# Altium PCB LUCRARE_LICENTA_PCB.PcbDoc
Units mm, origin at the board's own origin, x right, y up, seen from the top; angles counter-clockwise.
Board outline 100 x 100 mm, 4 copper layers (Top Layer, Int2 (Sign), Int3 (Sign), Bottom Layer), stack 1.481 mm thick; 103 components, 59 nets, 263 pads, 33 vias.
Unrouted connection lines stored in the file: 59.
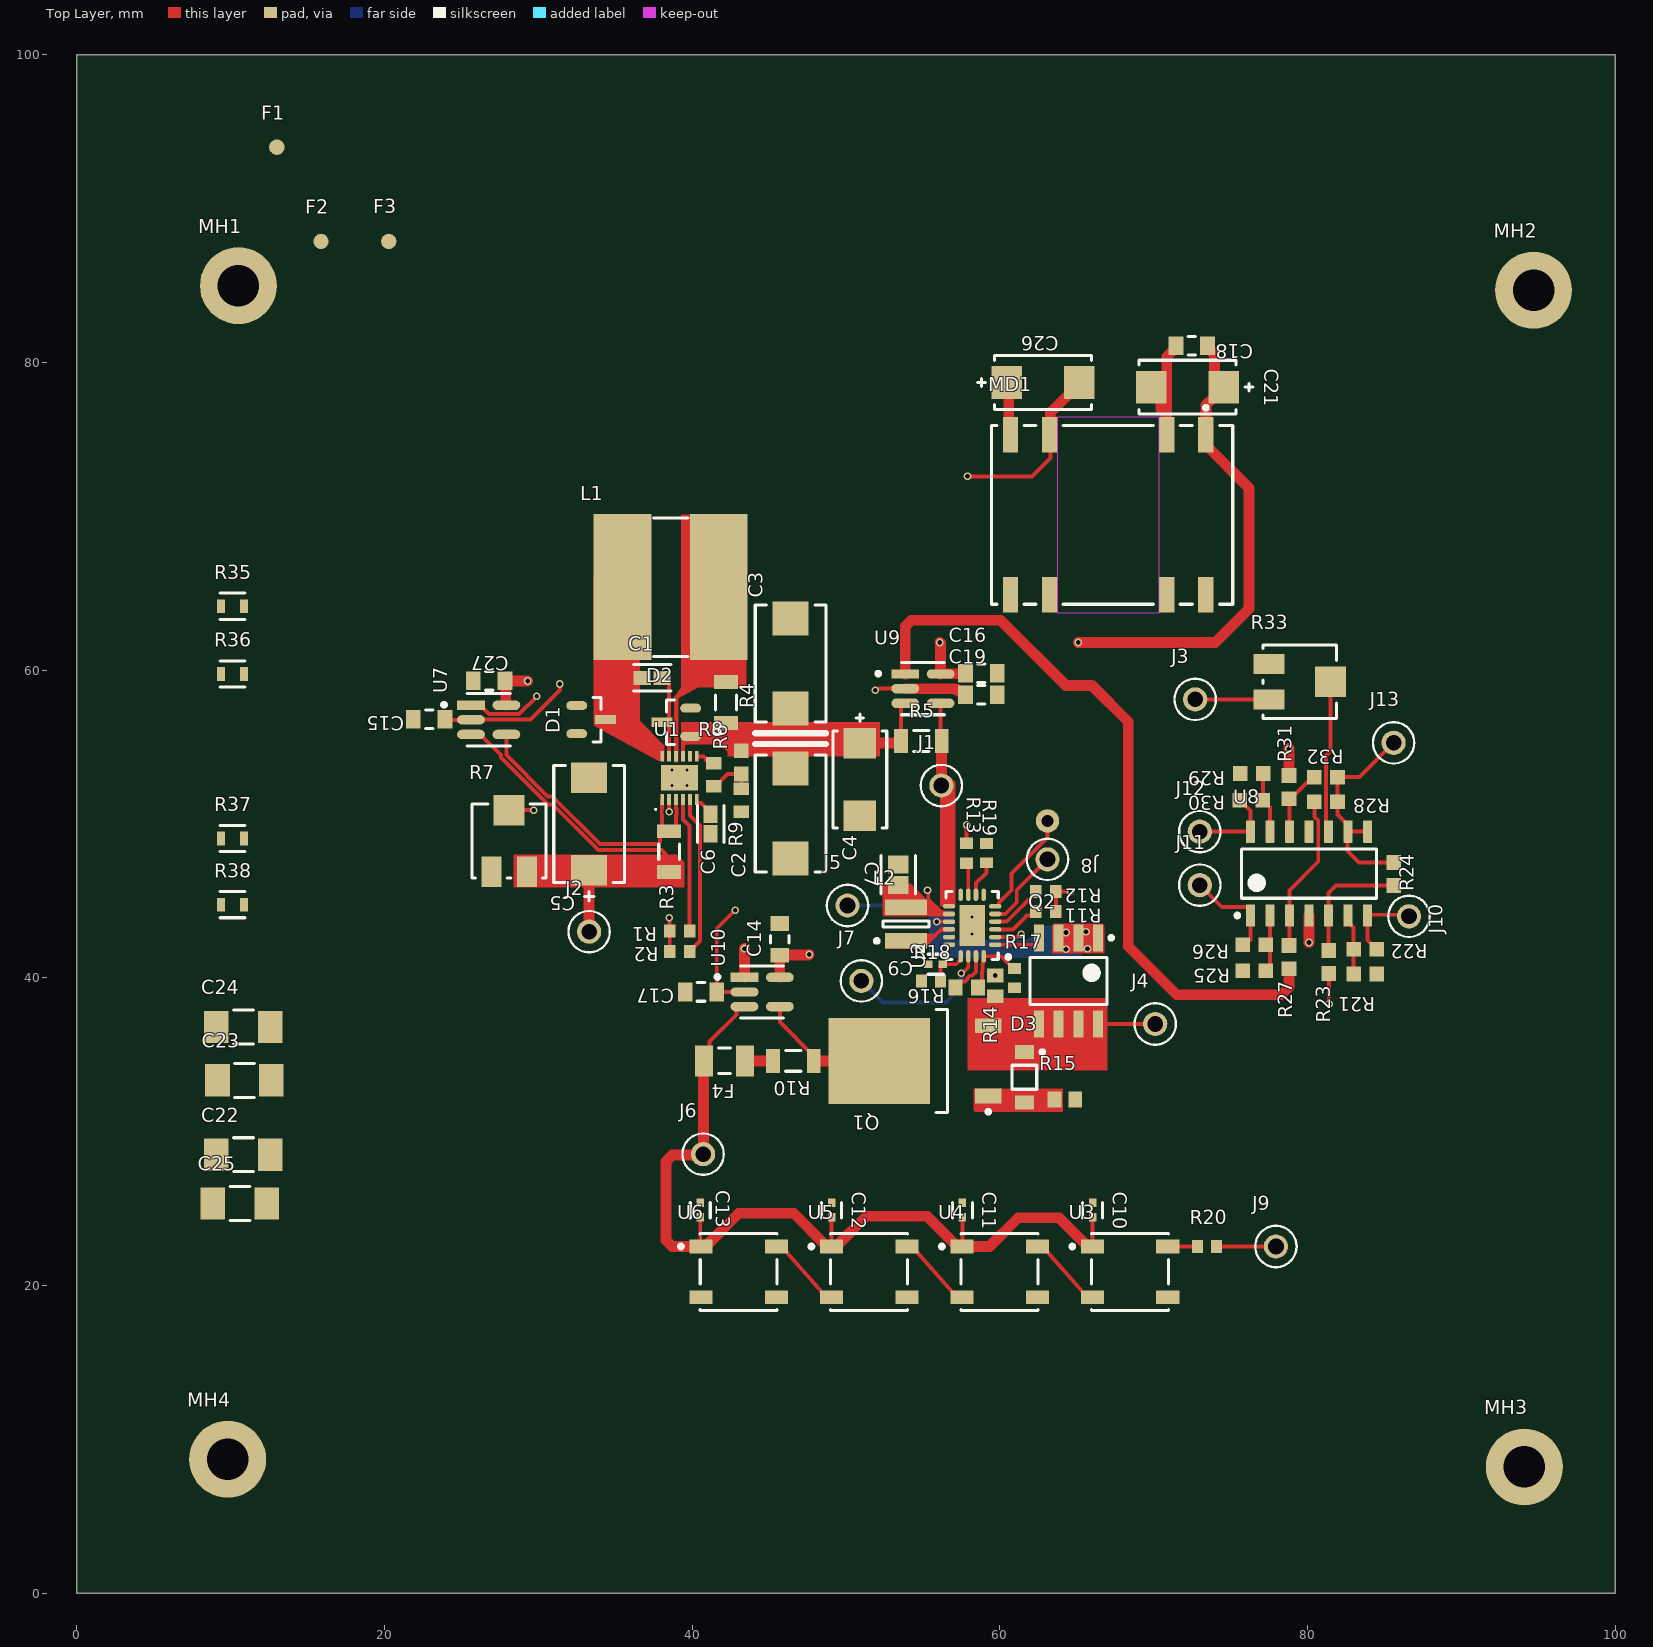
[diagram p0: Top Layer view]
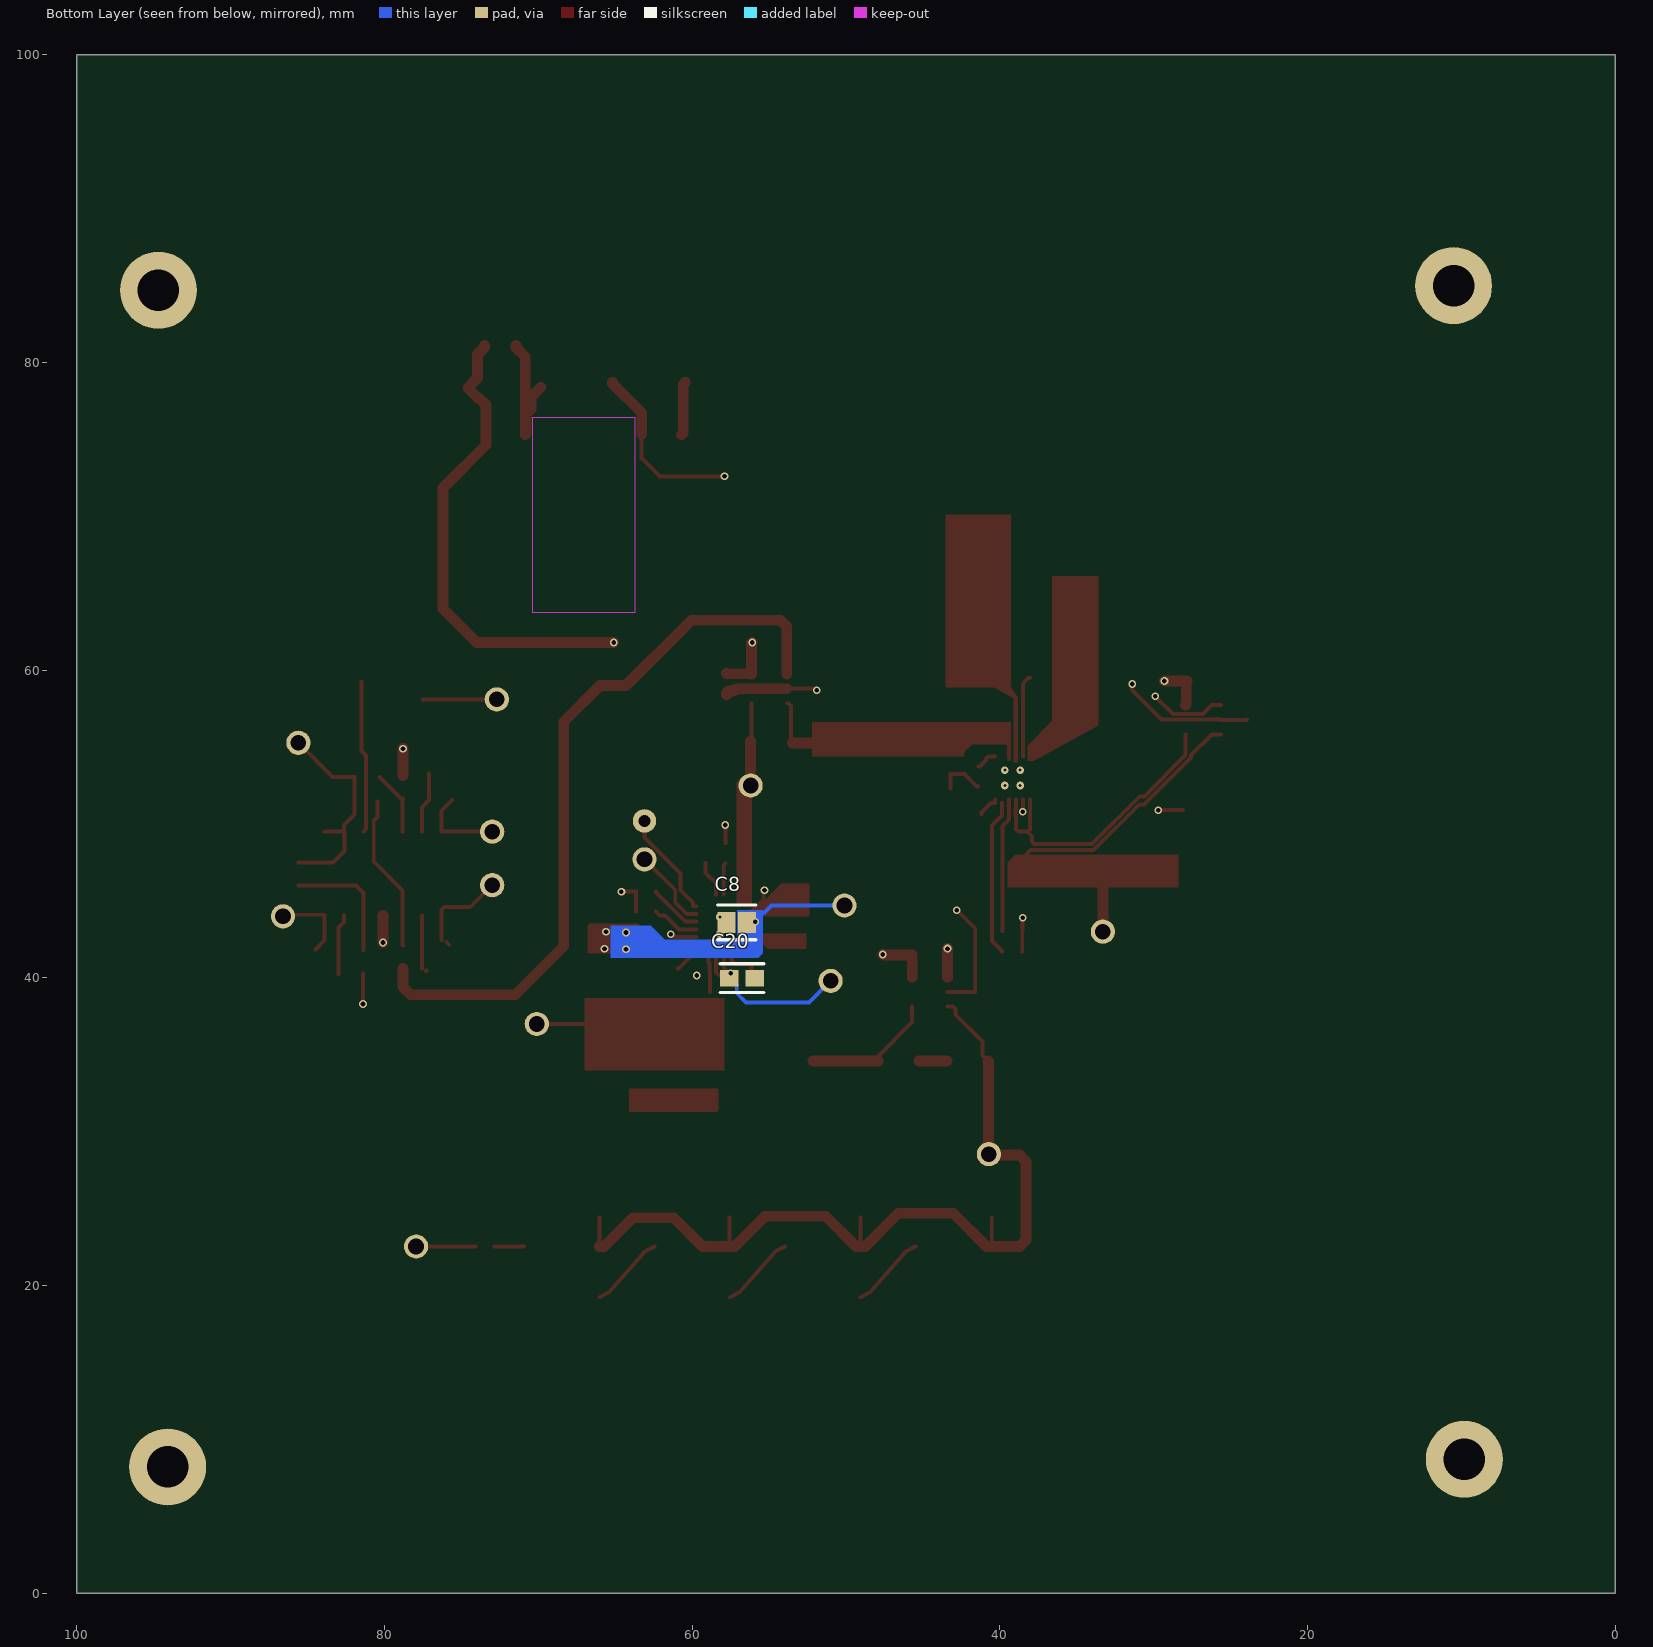
[diagram p1: Bottom Layer view, seen from below]
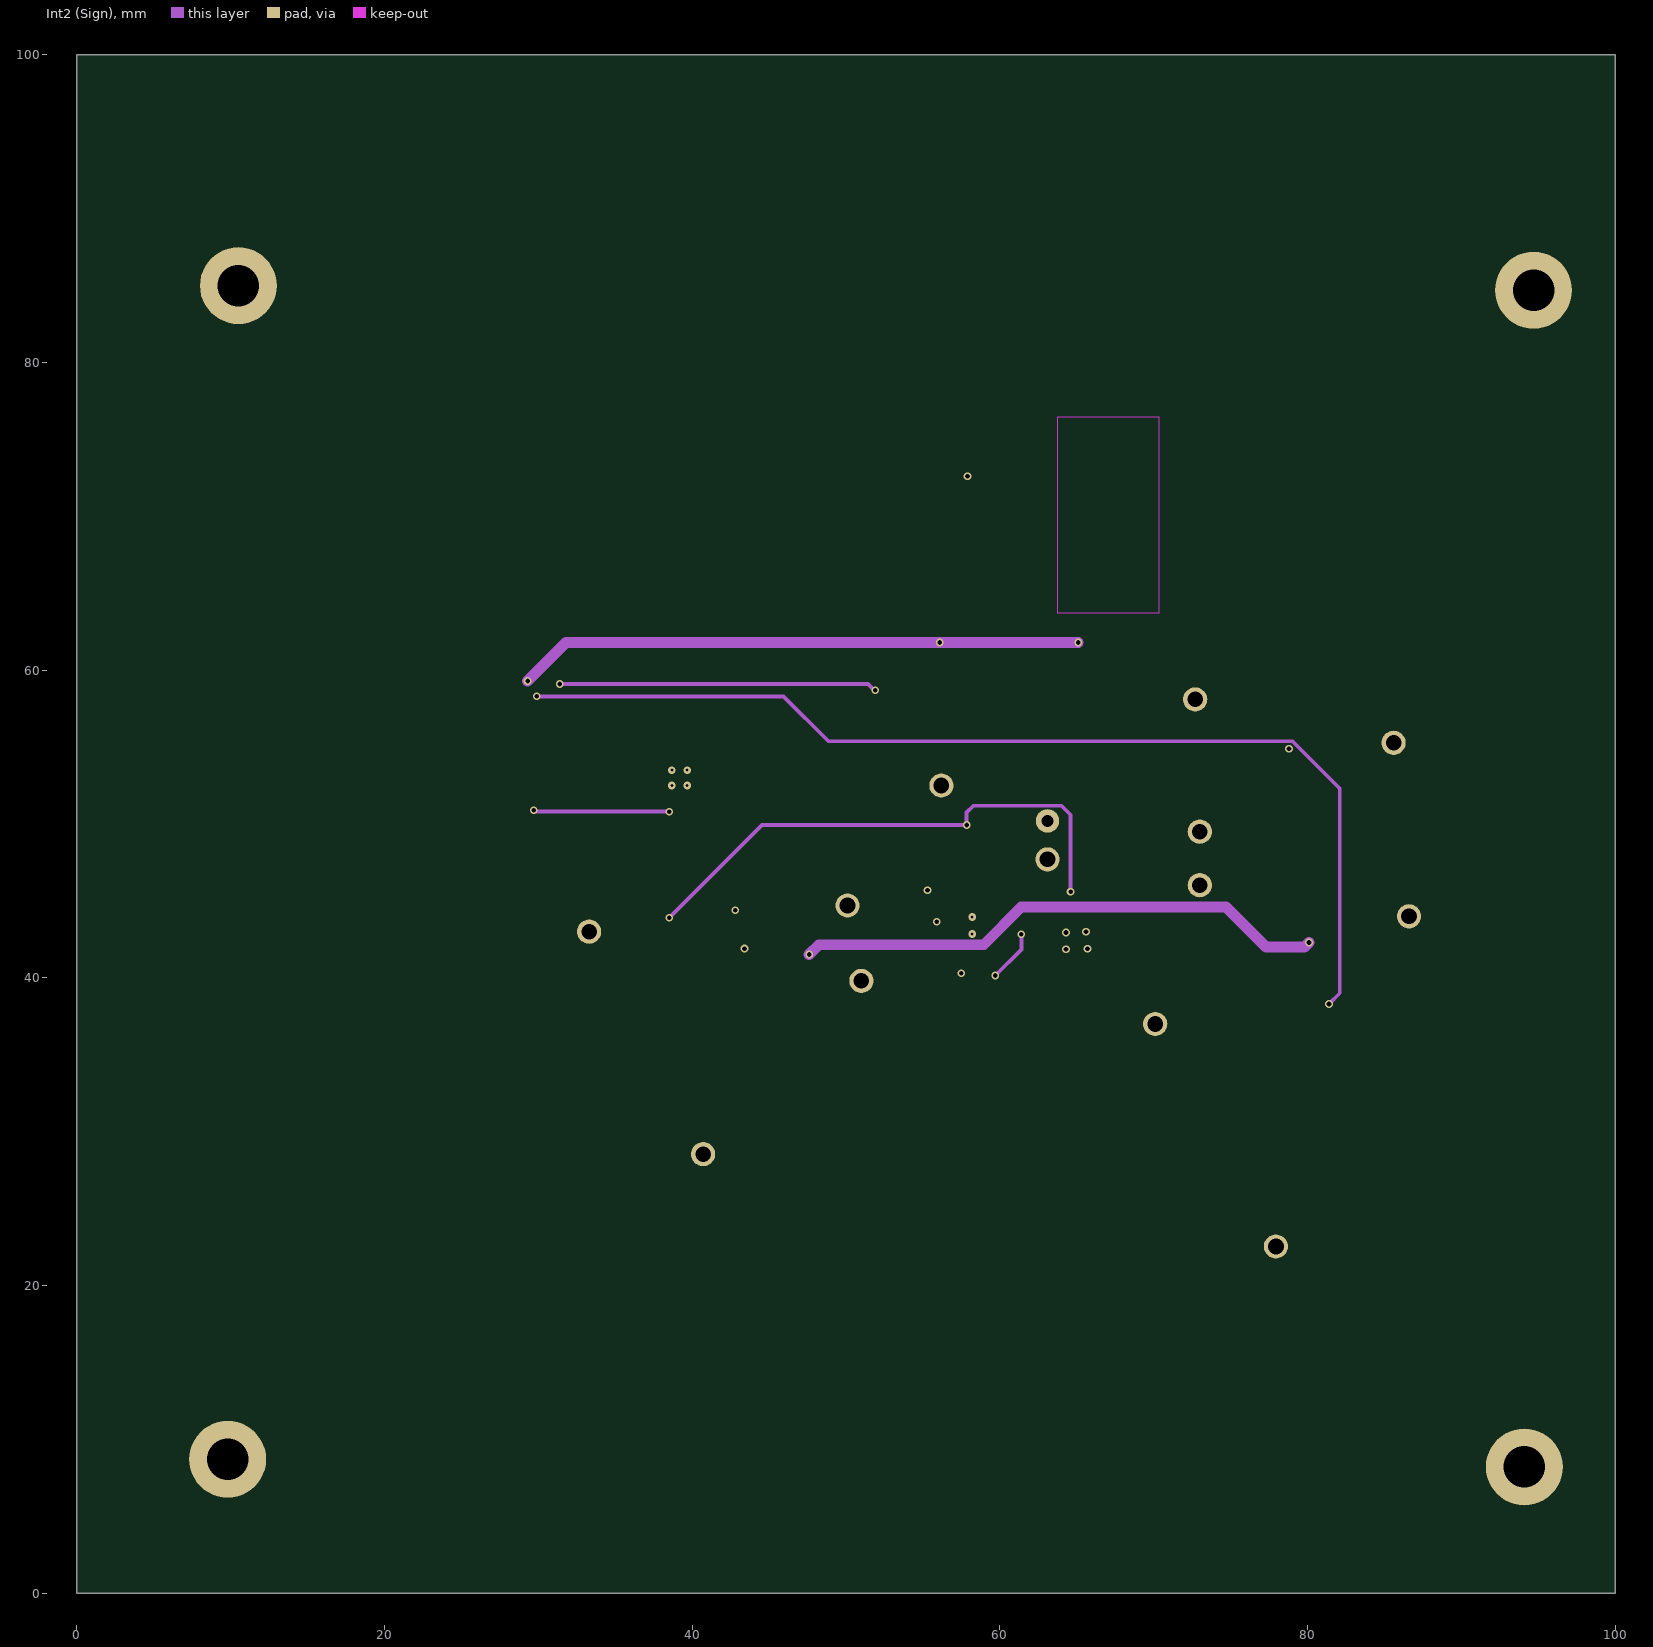
[diagram p2: Int2 (Sign)]
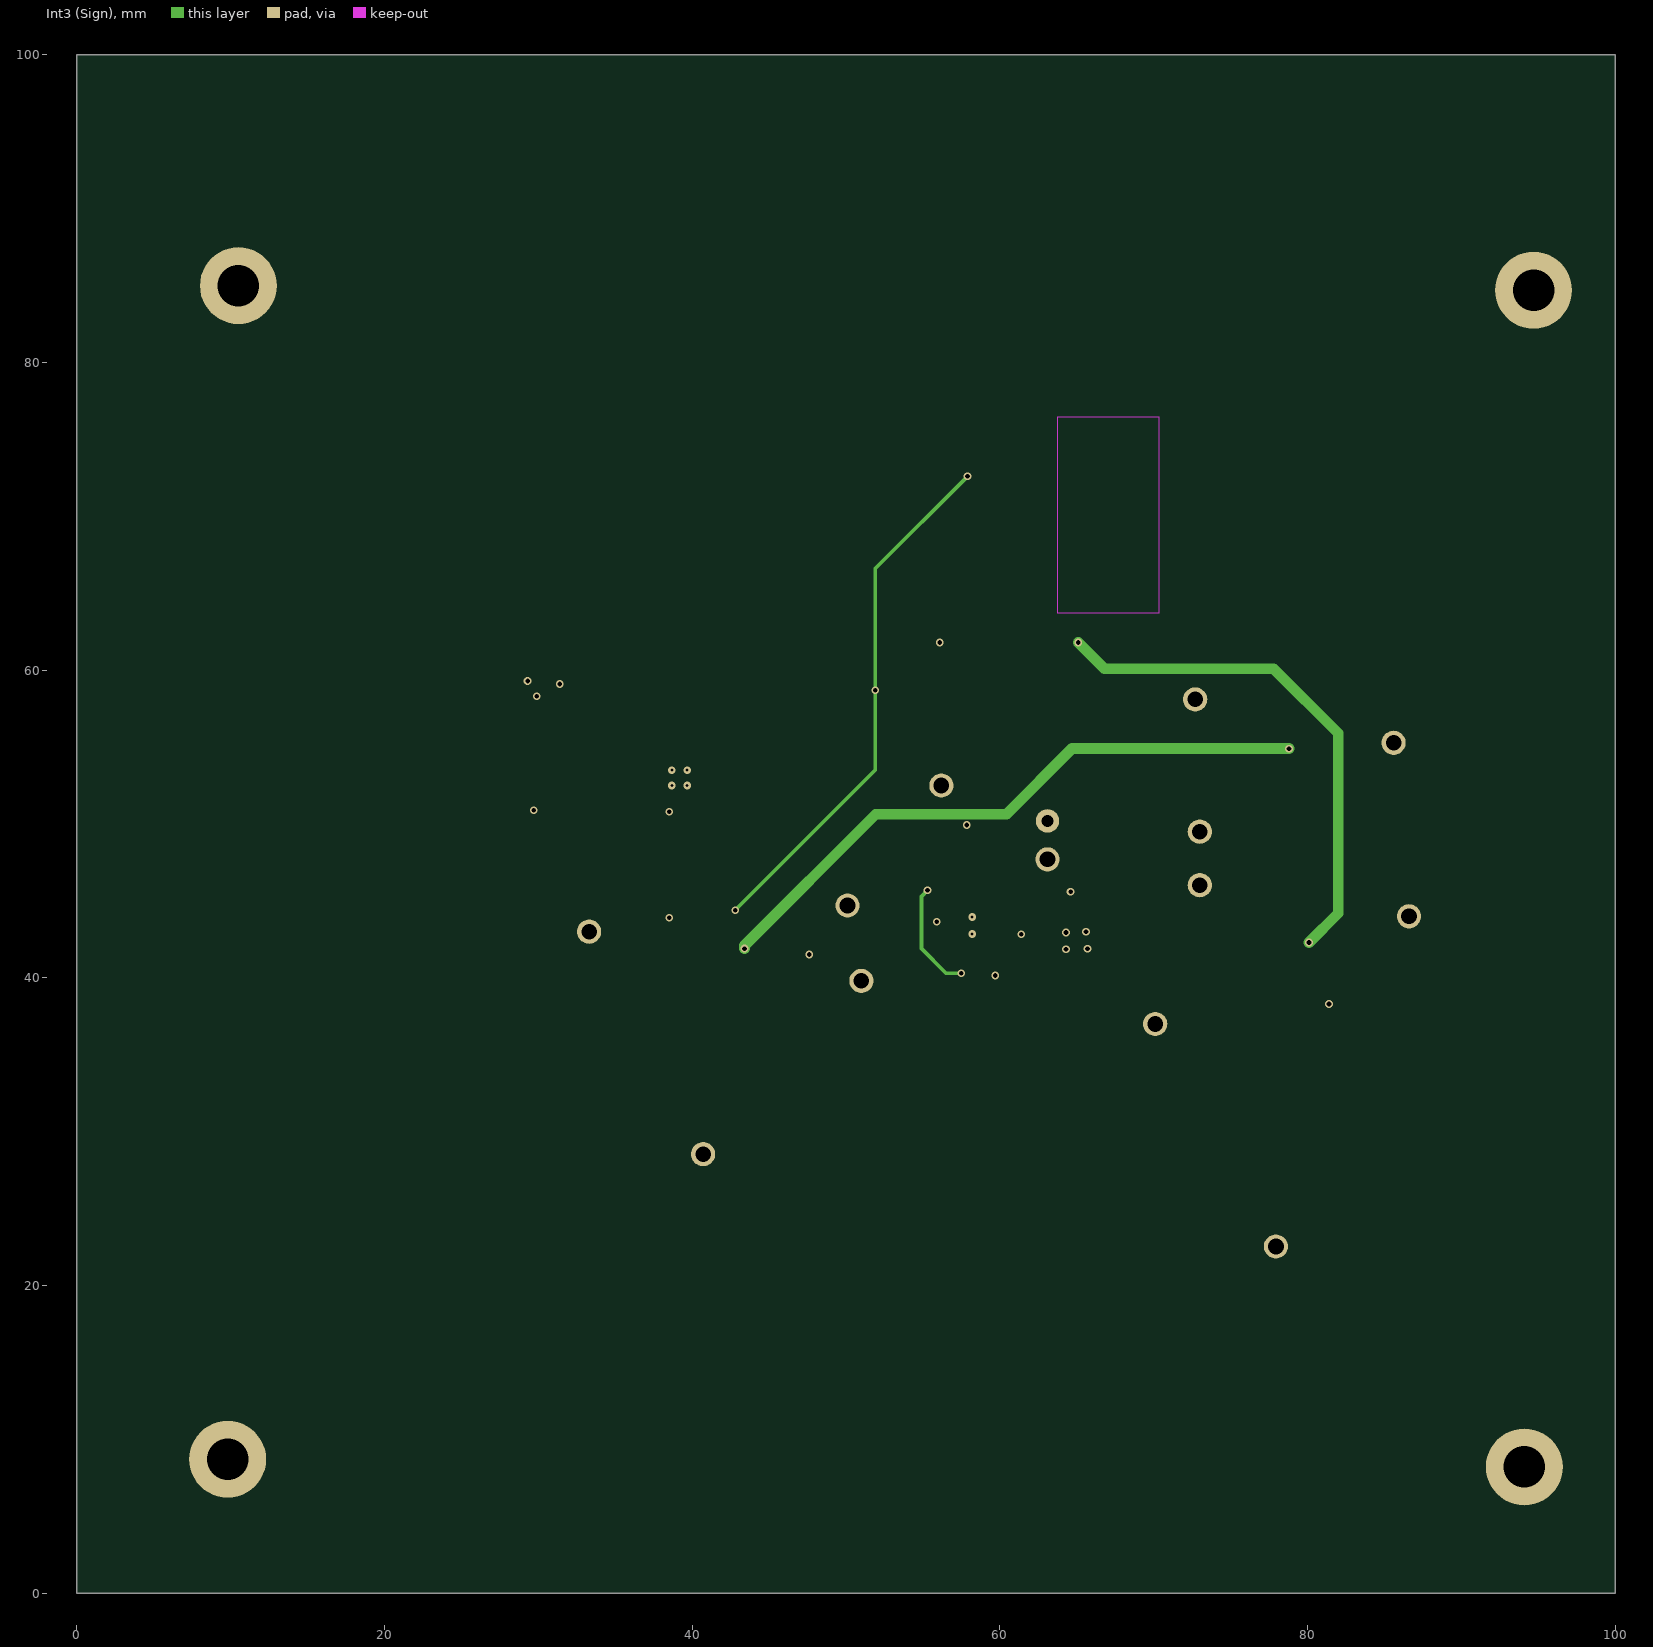
[diagram p3: Int3 (Sign)]
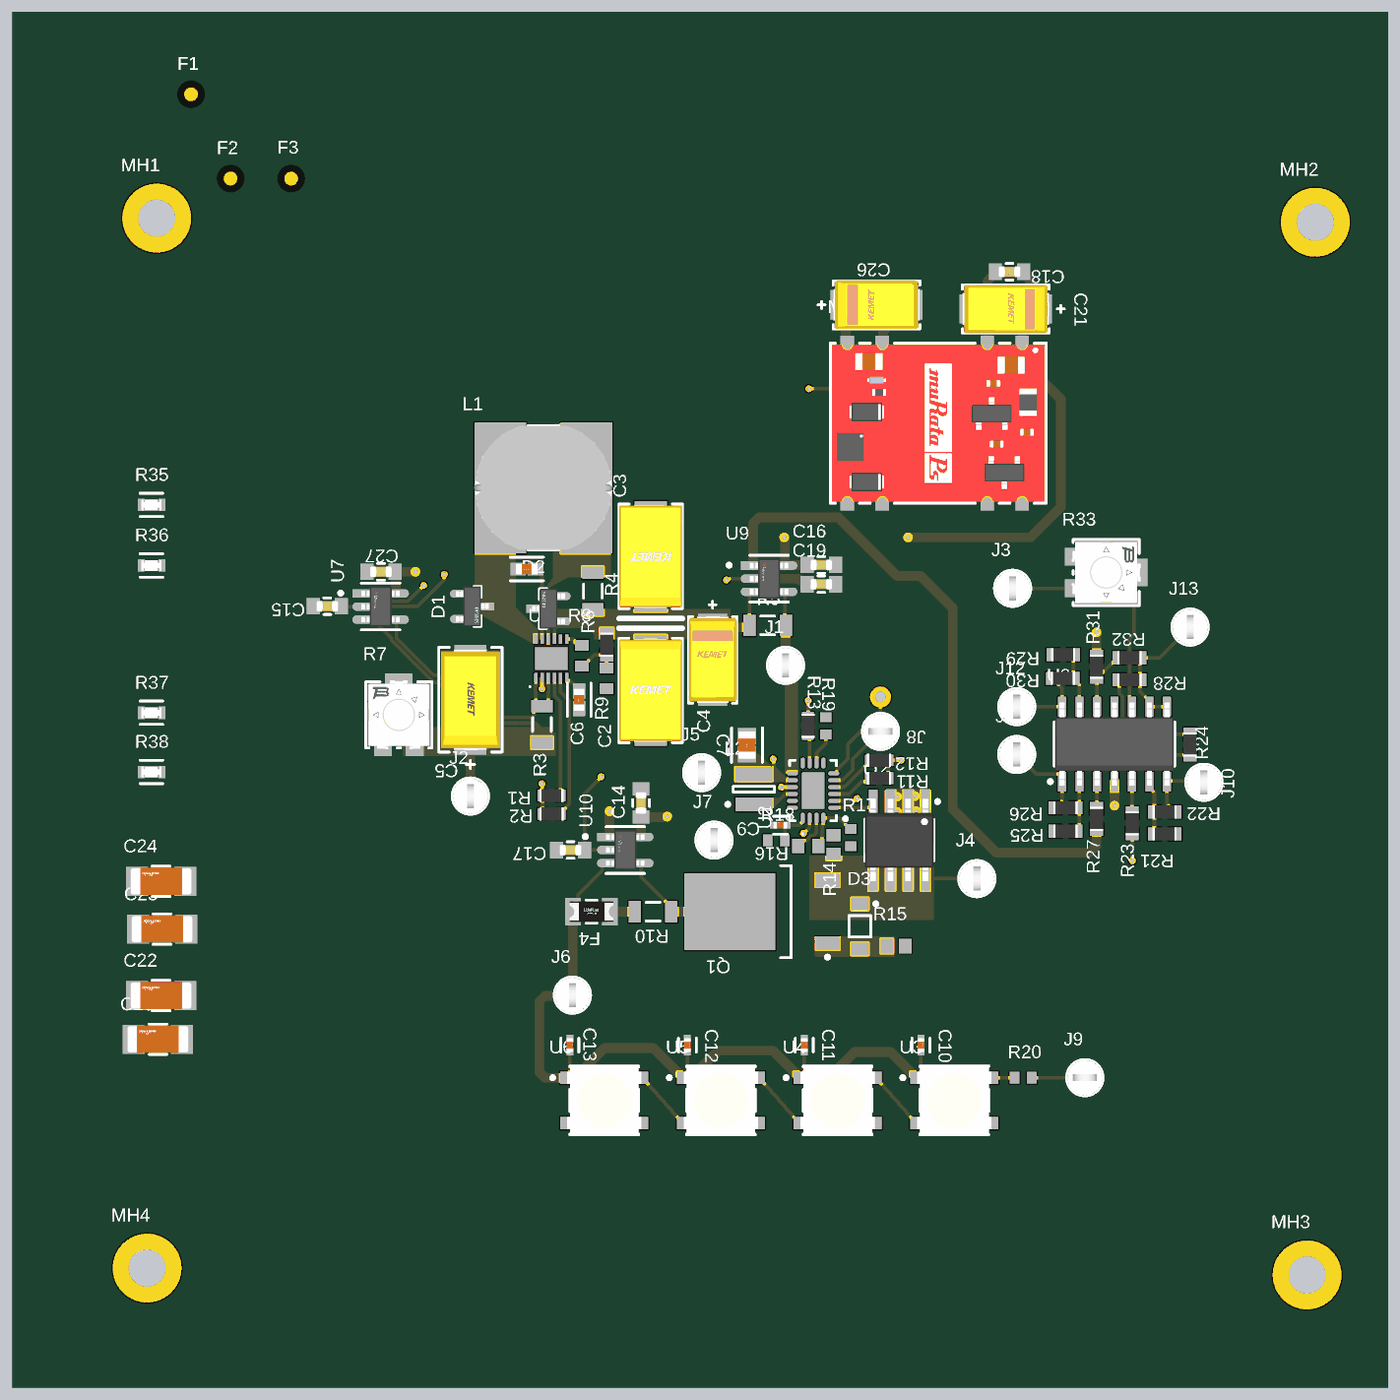
[diagram p4: 3D render of the assembled board from above, using the file's embedded part models]

## Layer stack, top to bottom
Top Solder: solder mask 0.0254, SM-001, Dk 4
Top Layer: signal copper 0.035
Dielectric 1: prepreg 0.0711, PP-006, Dk 4.1
Dielectric 2: prepreg 0.0711, PP-006, Dk 4.1
Dielectric 3: core 0.4572, Core-035, Dk 4.7
Int2 (Sign): signal copper 0.035
Dielectric 4: prepreg 0.0711, PP-006, Dk 4.1
Dielectric 5: prepreg 0.0711, PP-006, Dk 4.1
Int3 (Sign): signal copper 0.035
Dielectric 6: core 0.4572, Core-035, Dk 4.7
Dielectric 7: prepreg 0.0711, PP-006, Dk 4.1
Dielectric 8: prepreg 0.0711, PP-006, Dk 4.1
Bottom Layer: signal copper 0.035
Bottom Solder: solder mask 0.0254, SM-001, Dk 4

## Board outline
0,0 100,0 100,100 0,100

## Design rules (kind name [scope] priority, off if disabled: settings)
Clearance [All] p1: gap=0.1 ignorepadtopadclearanceinfootprint=FALSE except(0: Arc-Hole Track-Hole SMDPad-Hole THPad-Hole Via-Hole Fill-Hole Poly-Hole Region-Hole Text-Hole)
ComponentClearance [All] p1: gap=0.254 collisioncheckmode=3 verticalgap=10 showdistances=FALSE
PolygonConnect [All] p1: connectstyle=Relief reliefconductorwidth=0.254 reliefentries=4 polygonreliefangle="90 Angle" airgapwidth=0.254
RoutingVias [All] p1: holewidth=0.3 width=0.5 viastyle="Through Hole" minholewidth=0.3 minwidth=0.5 maxholewidth=0.711 maxwidth=1.27
SolderMaskExpansion [All] p1: expansion=0.102 istentingtop=FALSE
Width [All] p1: maxlimit=0.7 minlimit=0.254 preferedwidth=0.254 minimp=50.000000 maximp=50.000000 favimp=50.000000
29 further rules are at their usual default settings.

## Classes and differential pairs
component class Converter: C1 C2 C3 C4 C5 C6 C7 C8 C9 C20 D1 D2 D3 F4 J1 J2 J3 J4 J5 J6 J7 J8 L1 L2 Q1 Q2 R1 R2 R3 R4 R5 R6 R7 R8 R9 R10 R11 R12 R13 R14 R15 R16 R17 R18 R19 U1 U2
component class Auxiliary: C10 C11 C12 C13 C14 C15 C16 C17 C18 C19 C21 C22 C23 C24 C25 C26 C27 F1 F2 F3 J9 J10 J11 J12 J13 L? MD1 MH1 MH2 MH3 MH4 R20 R21 R22 R23 R24 R25 R26 R27 R28 R29 R30 R31 R32 R33 R35 R36 R37 R38 U3 U4 U5 U6 U7 U8 U9 U10

## Components (designator, comment, footprint, x,y, rotation, side; value= is the part's Value field where it differs from the comment)
C1 "1uF" FP-C1608-080-0_1-IPC_B 37.4,59.5 r0 top
C2 "47uF" KEMT-T491-D_L 46.4,50.675 r270 top
C3 "47uF" KEMT-T491-D_L 46.4,60.425 r90 top
C4 "10uF" FP-T491C106K016AT-MFG 50.9,52.9 r90 top
C5 "10uF" FP-T491D-MFG 33.3,50 r270 top
C6 "1uF" FP-C1608-080-0_1-IPC_B 41.2,50 r90 top
C7 "22uF" FP-C2012-125-0_2-IPC_C 53.4,46.7 r90 top
C8 "22uF" FP-C2012-125-0_2-IPC_C 57.1,43.6 r0 bottom
C9 "0.1uF" FP-GRM155-0_05-MFG 55.825,40.88 r180 top
C10 "0.1uF" FP-GRM155-0_05-MFG 66.037,24.9 r90 top
C11 "0.1uF" FP-GRM155-0_05-MFG 57.561,24.9 r90 top
C12 "0.1uF" FP-GRM155-0_05-MFG 49.066,24.9 r90 top
C13 "0.1uF" FP-GRM155-0_05-MFG 40.524,24.9 r90 top
C14 "100nF" FP-CGA3E-0_3-0_1-IPC_A 45.7,42.5 r90 top
C15 "100nF" FP-CGA3E-0_3-0_1-IPC_A 22.9,56.8 r180 top
C16 "100nF" FP-CGA3E-0_3-0_1-IPC_A 58.8,59.8 r0 top
C17 "100nF" FP-CGA3E-0_3-0_1-IPC_A 40.575,39.08 r180 top
C18 "100nF" FP-CGA3E-0_3-0_1-IPC_A 72.475,81.1 r180 top
C19 "100nF" FP-CGA3E-0_3-0_1-IPC_A 58.8,58.4 r0 top
C20 "1uF" FP-0603-L_1_6_0_15-W_0_81-IPC_A 56.75,39.98 r180 bottom
C21 "10uF" FP-T491C106K016AT-MFG 72.2,78.4 r0 top
C22 "100pF" FP-GA342Q-0_3-e0_3_1_15-IPC_C 10.817,28.504 r180 top
C23 "100pF" FP-GA342Q-0_3-e0_3_1_15-IPC_C 10.89,33.332 r180 top
C24 "100pF" FP-GA342Q-0_3-e0_3_1_15-IPC_C 10.817,36.805 r180 top
C25 "100pF" FP-GA342Q-0_3-e0_3_1_15-IPC_C 10.59,25.332 r180 top
C26 "10uF" FP-T491C106K016AT-MFG 62.814,78.698 r180 top
C27 "100nF" FP-CGA3E-0_3-0_1-IPC_A 26.8,59.3 r0 top
D1 "ZLLS500TA" FP-SOT23-IPC_B 33.427,56.785 r0 top
D2 "ZLLS500TA" FP-SOT23-IPC_B 38.973,56.615 r180 top
D3 "MMSZ11T1G" ONSC-SOD-123-2-425-04_V 61.6,33.535 r270 top
F1 "FIDUCIAL" FIDUCIAL 13,94 r90 top
F2 "FIDUCIAL" FIDUCIAL 15.873,87.873 r90 top
F3 "FIDUCIAL" FIDUCIAL 20.273,87.873 r90 top
F4 "0466001.NR" FP-0466-MFG 42.1,34.6 r0 top value=0.075Ω
J1 "5002" FP-5002-MFG 56.2,52.5 r270 top
J2 "5002" FP-5002-MFG 33.3,43 r90 top
J3 "5002" FP-5002-MFG 72.7,58.1 r90 top
J4 "5002" FP-5002-MFG 70.1,37 r90 top
J5 "5002" FP-5002-MFG 50.1,44.7 r90 top
J6 "5002" FP-5002-MFG 40.711,28.536 r90 top
J7 "5002" FP-5002-MFG 51,39.8 r90 top
J8 "5002" FP-5002-MFG 63.1,47.7 r180 top
J9 "5002" FP-5002-MFG 77.949,22.535 r180 top
J10 "5002" FP-5002-MFG 86.6,44 r90 top
J11 "5002" FP-5002-MFG 73,46.023 r90 top
J12 "5002" FP-5002-MFG 73,49.5 r90 top
J13 "5002" FP-5002-MFG 85.6,55.28 r90 top
L1 "68uH" WE-PD2-XL 38.6,65.4 r0 top
L2 "3.3uH" BOUR-SRN3015-2_V 53.9,43.5 r90 top
MD1 "NXJ2S0505MC-R7" FP-NXJ2SM-MFG 67.3,70.1 r180 top
MH1 "MH2.5" "Mounting Hole" 10.5,85 r180 top
MH2 "MH2.5" "Mounting Hole" 94.7,84.7 r180 top
MH3 "MH2.5" "Mounting Hole" 94.1,8.2 r180 top
MH4 "MH2.5" "Mounting Hole" 9.8,8.7 r180 top
Q1 "SPD15P10PL G" INF-PG-TO252-3-1_N 54.5,34.6 r180 top
Q2 "FDS6690A" FAIR-SOIC-8_V 64.465,39.8 r270 top
R1 "10k" RESC1609X55X30LL15T15 39.185,43.043 r0 top
R2 "10k" RESC1609X55X30LL15T15 39.2,41.7 r0 top
R3 "0.22" RESC3216X70X50LL05T20 38.5,48.2 r90 top
R4 "0.22" RESC3216X70X50LL05T20 42.2,57.9 r270 top
R5 "0.22" RESC3216X70X50LL05T20 54.9,55.4 r0 top
R6 "47k" RESC1608X55X30NL15T15 43.2,54 r90 top
R7 "3314J-1-103E" FP-3314J-1-MFG 28.1,48.9 r0 top
R8 "220k" RESC1608X55X25ML10T15 41.4,53.2 r90 top
R9 "220k" RESC1608X55X25ML10T15 43.2,51.55 r90 top
R10 "0.22" RESC3216X70X50LL05T20 46.575,34.6 r0 top
R11 "10k" RESC1609X55X30LL15T15 63,44.3 r0 top
R12 "10k" RESC1609X55X30LL15T15 63,45.6 r0 top
R13 "10k" RESC1609X55X30LL15T15 57.825,48.1 r90 top
R14 "6.2k" RESC1609X50X30ML10T20 59.7,39.475 r270 top
R15 "6.2k" RESC1609X50X30ML10T20 64.225,32.1 r180 top
R16 "100k" RESC1608X55X30ML15T15 57.85,39.38 r0 top
R17 "1k" RESC1608X55X30LL15T15 60.95,39.98 r90 top
R18 "3.01k" RESC1608X55X30LL15T15 55.525,39.78 r0 top
R19 "1k" RESC1608X55X30LL15T15 59.125,48.1 r270 top
R20 "1k" RESC1608X55X30LL15T15 73.468,22.535 r0 top
R21 "47k" RESC1608X55X30NL15T15 83.75,40.25 r0 top
R22 "47k" RESC1608X55X30NL15T15 83.75,41.85 r180 top
R23 "47k" RESC1608X55X30NL15T15 81.384,41.03 r270 top
R24 "47k" RESC1608X55X30NL15T15 85.6,46.75 r90 top
R25 "47k" RESC1608X55X30NL15T15 76.55,40.45 r180 top
R26 "47k" RESC1608X55X30NL15T15 76.55,42.15 r0 top
R27 "47k" RESC1608X55X30NL15T15 78.8,41.35 r270 top
R28 "47k" RESC1608X55X30NL15T15 81.2,51.45 r0 top
R29 "47k" RESC1608X55X30NL15T15 76.376,53.281 r180 top
R30 "47k" RESC1608X55X30NL15T15 76.35,51.55 r0 top
R31 "47k" RESC1608X55X30NL15T15 78.8,52.4 r90 top
R32 "47k" RESC1608X55X30NL15T15 81.2,53.05 r0 top
R33 "3314J-1-103E" FP-3314J-1-MFG 79.5,59.25 r270 top
R35 "1M" FP-CRCW0603C-e3-MFG 10.117,64.154 r180 top
R36 "1M" FP-CRCW0603C-e3-MFG 10.117,59.754 r180 top
R37 "1M" FP-CRCW0603C-e3-MFG 10.117,49.054 r180 top
R38 "1M" FP-CRCW0603C-e3-MFG 10.117,44.754 r180 top
U1 "LT3652EDD#PBF" LT-DD-12_V 39.175,53 r90 top
U2 "LTC4160EUDC#PBF" LT-UDC-20_N 58.2,43.4 r180 top
U3 "1655" ADA-RGB-1655_V 68.468,20.883 r0 top
U4 "1655" ADA-RGB-1655_V 59.986,20.883 r0 top
U5 "1655" ADA-RGB-1655_V 51.505,20.883 r0 top
U6 "1655" ADA-RGB-1655_V 43.023,20.883 r0 top
U7 "INA180A1IDBVR" FP-DBV0005A-IPC_A 26.772,56.773 r0 top
U8 "TL074CDR" D0014A_N 80.1,46.775 r90 top
U9 "INA180A1IDBVR" FP-DBV0005A-IPC_A 55,58.8 r0 top
U10 "INA180A1IDBVR" FP-DBV0005A-IPC_A 44.55,39.08 r0 top

## Footprints (in the part's own frame and the unit in brackets; to place one, negate y for a bottom-side part, rotate by r counter-clockwise, add the part's x,y. Pads: shape width x height; smd on the part's side, far side on the other; paste and mask are expansions set on the pad)
ADA-RGB-1655_V [mm] "SMD, 4-Leads, Body 5x5mm"
  rect 1.5x0.9 smd: 1(-2.45,1.65) 2(-2.45,-1.65) 3(2.45,-1.65) 4(2.45,1.65)
  silkscreen extent -3.87,-2.5 2.5,2.5, body extent -2.7,-2.5 2.7,2.5, height 1.68
BOUR-SRN3015-2_V [mm] "SMD, 2-Leads, Body 3x3mm, Height 1.5mm"
  rect 1x2.7 smd: 1(-1.1,0) 2(1.1,0)
  silkscreen extent -1.22,-1.5 0.2,2.02, body extent -1.5,-1.5 1.5,1.5, height 1.5
D0014A_N [mm] "SOIC, 14-Leads, Body 8.75x4mm, Pitch 1.27mm, IPC Medium Density"
  rrect17% 1.45x0.6 smd: 1(-2.725,3.81) 2(-2.725,2.54) 3(-2.725,1.27) 4(-2.725,0) 5(-2.725,-1.27) 6(-2.725,-2.54) 7(-2.725,-3.81) 8(2.725,-3.81) 9(2.725,-2.54) 10(2.725,-1.27) 11(2.725,0) 12(2.725,1.27) 13(2.725,2.54) 14(2.725,3.81)
  silkscreen extent -2.85,-4.38 1.6,4.78, body extent -3.02,-4.32 3.02,4.32, height 1.59
FAIR-SOIC-8_V [mm] "SOIC, 8-Leads, Body 5x4mm, Pitch 1.27mm"
  rect 1.75x0.65 smd: 1(-2.8,1.905) 2(-2.8,0.635) 3(-2.8,-0.635) 4(-2.8,-1.905) 5(2.8,-1.905) 6(2.8,-0.635) 7(2.8,0.635) 8(2.8,1.905)
  silkscreen extent -2.92,-2.5 1.53,2.91, body extent -3,-2.5 3,2.5, height 1.75
FIDUCIAL [mm]
  round 1 smd paste-2 mask+0.508: FID(0,0)
FP-0466-MFG [mil]
  rect 45x80 smd paste+0 mask+0: 1(-52.5,0) 2(52.5,0)
  silkscreen extent -15,-32 15,32, body extent -79,-44 79,44, height 10
FP-0603-L_1_6_0_15-W_0_81-IPC_A [mil]
  rect 47.5x42.06 smd paste+0 mask+0: 1(-32.51,0) 2(32.51,0)
  silkscreen extent -56,-37 56,37, body extent -31,-16 31,16, height 35
FP-3314J-1-MFG [mm]
  rect 1.3x2 smd paste+0 mask+0: 1(1.15,-2) 3(-1.15,-2)
  rect 2x2 smd paste+0 mask+0: 2(0,2)
  silkscreen extent -2.4,-2.4 2.4,2.4, body extent -2.5,-3.1 2.5,3.1, height 0.25
FP-5002-MFG [mm]
  round 1.57 hole 1.02 paste-1000 mask+0: 1(0,0)
  silkscreen extent -1.34,-1.35 1.34,1.35, body extent -1.45,-1.45 1.45,1.45, height 0.25
FP-C1608-080-0_1-IPC_B [mm]
  rect 1.131x0.912 smd paste+0 mask+0: 1(-0.641,0) 2(0.641,0)
  silkscreen extent -1.21,-0.86 1.21,0.86, body extent -1.46,-0.71 1.46,0.71, height 0.25
FP-C2012-125-0_2-IPC_C [mm]
  rect 1.178x1.356 smd paste+0 mask+0: 1(-0.664,0) 2(0.664,0)
  silkscreen extent -1.25,-1.12 1.25,1.12, body extent -1.35,-0.82 1.35,0.82, height 0.25
FP-CGA3E-0_3-0_1-IPC_A [mm]
  rect 0.956x1.206 smd paste+0 mask+0: 1(-1.025,0) 2(1.025,0)
  silkscreen extent -0.25,-0.6 0.25,0.6, body extent -2,-1.1 2,1.1, height 0.25
FP-CRCW0603C-e3-MFG [mm]
  rect 0.5x0.9 smd paste+0 mask+0: 1(-0.75,0) 2(0.75,0)
  silkscreen extent -0.82,-0.85 0.82,0.85, body extent -1.1,-0.55 1.1,0.55, height 0.25
FP-DBV0005A-IPC_A [mm]
  rect 1.805x0.612 smd paste+0 mask+0: 1(-1.15,0.95)
  rrect100% 1.805x0.612 smd paste+0 mask+0: 2(-1.15,0) 3(-1.15,-0.95) 4(1.15,-0.95) 5(1.15,0.95)
  silkscreen extent -3.03,-1.7 1.4,1.7, body extent -2.55,-1.95 2.55,1.95, height 0.25
FP-GA342Q-0_3-e0_3_1_15-IPC_C [mm]
  rect 1.603x2.106 smd paste+0 mask+0: 1(-1.751,0) 2(1.751,0)
  silkscreen extent -0.65,-1.1 0.65,1.1, body extent -2.65,-1.2 2.65,1.2, height 0.25
FP-GRM155-0_05-MFG [mm]
  rect 0.55x0.5 smd paste+0 mask+0: 1(-0.475,0) 2(0.475,0)
  silkscreen extent -0.5,-0.65 0.5,0.65, body extent -0.85,-0.38 0.85,0.38, height 0.25
FP-NXJ2SM-MFG [mm]
  rect 1x2.3 smd paste+0 mask+0: 1(-6.095,-5.205) 2(-3.555,-5.205) 5(4.065,-5.205) 6(6.605,-5.205) 7(6.605,5.205) 8(4.065,5.205) 11(-3.555,5.205) 12(-6.095,5.205)
  Keep-Out Layer region: -3.055,-6.355 3.565,-6.355 3.565,6.355 -3.055,6.355
  Keep-Out Layer region: -3.055,-6.355 3.565,-6.355 3.565,6.355 -3.055,6.355
  silkscreen extent -7.85,-7.09 7.85,5.81, body extent -7.95,-6.46 7.95,6.46, height 0.25
FP-SOT23-IPC_B [mm]
  rect 1.359x0.587 smd paste+0 mask+0: 1(0.927,0)
  rrect100% 1.359x0.587 smd paste+0 mask+0: 2(-0.927,-0.915) 3(-0.927,0.915)
  silkscreen extent 0.13,-1.45 0.65,1.45, body extent -1.86,-1.7 1.86,1.7, height 0.25
FP-T491C106K016AT-MFG [mm]
  rect 1.99x2.13 smd paste+0 mask+0: 1(-2.36,0) 2(2.36,0)
  silkscreen extent -3.15,-1.75 4.25,1.75, body extent -3.48,-1.87 3.48,1.87, height 0.25
FP-T491D-MFG [mm]
  rect 1.99x2.33 smd paste+0 mask+0: 1(-3.01,0) 2(3.01,0)
  silkscreen extent -3.8,-2.3 5,2.3, body extent -4.13,-2.42 4.13,2.42, height 0.25
INF-PG-TO252-3-1_N [mm] "DPAK, 3-Leads, Body 6.525x6.12mm, Pitch 2.28mm, IPC Medium Density"
  rect 1.75x0.95 smd: 1(-4.75,2.28) 3(-4.75,-2.28)
  rect 6.6x5.6 smd: 2(2.35,0)
  silkscreen extent -4.87,-3.35 -1.35,3.43, body extent -2.1,-3.32 4.12,3.32, height 2.35
KEMT-T491-D_L [mm] "Molded Capacitor, 2-Leads, Body 7.60x4.60mm, IPC High Density"
  rect 2.2x2.35 smd: 1(-2.925,0) 2(2.925,0)
  silkscreen extent -4.52,-2.3 3.8,2.3, body extent -3.8,-2.3 3.8,2.3, height 3.1
LT-DD-12_V [mm] "SON, 12-Leads, Body 3x3mm, Pitch 0.45mm, Thermal Pad 2.38x1.65mm"
  rect 0.7x0.25 smd: 1(-1.4,1.125) 2(-1.4,0.675) 3(-1.4,0.225) 4(-1.4,-0.225) 5(-1.4,-0.675) 6(-1.4,-1.125) 7(1.4,-1.125) 8(1.4,-0.675) 9(1.4,-0.225) 10(1.4,0.225) 11(1.4,0.675) 12(1.4,1.125)
  rect 1.65x2.38 smd: 13(0,0)
  silkscreen extent -2.1,1.5 -2,1.6, body extent -1.5,-1.5 1.5,1.5, height 0.8
LT-UDC-20_N [mm] "QFN, 20-Leads, Body 4.1x3.1mm, Pitch 0.5mm, Thermal Pad 2.65x1.65mm, IPC Medium Density"
  oval 0.8x0.3 smd: 1(-1.5,1.25) 2(-1.5,0.75) 3(-1.5,0.25) 4(-1.5,-0.25) 5(-1.5,-0.75) 6(-1.5,-1.25) 11(1.5,-1.25) 12(1.5,-0.75) 13(1.5,-0.25) 14(1.5,0.25) 15(1.5,0.75) 16(1.5,1.25)
  oval 0.3x0.8 smd: 7(-0.75,-2) 8(-0.25,-2) 9(0.25,-2) 10(0.75,-2) 17(0.75,2) 18(0.25,2) 19(-0.25,2) 20(-0.75,2)
  rect 1.65x2.65 smd: 21(0,0)
  silkscreen extent -2.48,-2.2 1.7,2.2, body extent -1.55,-2.05 1.55,2.05, height 0.8
"Mounting Hole" [mm]
  round 5 hole 2.7: 1(0,0)
ONSC-SOD-123-2-425-04_V [mm] "SOD, 2-Leads, Body 2.69x1.6mm"
  rect 0.91x1.22 smd: 1(-1.635,0) 2(1.635,0)
  silkscreen extent -1.76,-0.8 0.78,1.29, body extent -1.35,-0.8 1.35,0.8, height 1.35
RESC1608X55X25ML10T15 [mm] "Chip Resistor, 2-Leads, Body 1.70x0.90mm, IPC Low Density"
  rect 0.8x1 smd: 1(-0.75,0) 2(0.75,0)
  body extent -0.85,-0.45 0.85,0.45, height 0.55
RESC1608X55X30LL15T15 [mm] "Chip Resistor, 2-Leads, Body 1.60x0.80mm, IPC High Density"
  rect 0.7x0.85 smd: 1(-0.625,0) 2(0.625,0)
  body extent -0.87,-0.48 0.87,0.48, height 0.55
RESC1608X55X30ML15T15 [mm] "Chip Resistor, 2-Leads, Body 1.60x0.80mm, IPC Low Density"
  rect 0.9x1.05 smd: 1(-0.725,0) 2(0.725,0)
  body extent -0.87,-0.48 0.87,0.48, height 0.55
RESC1608X55X30NL15T15 [mm] "Chip Resistor, 2-Leads, Body 1.75x0.95mm, IPC Medium Density"
  rect 0.95x0.95 smd: 1(-0.75,0) 2(0.75,0)
  body extent -0.87,-0.48 0.87,0.48, height 0.55
RESC1609X50X30ML10T20 [mm] "Chip Resistor, 2-Leads, Body 1.55x0.85mm, IPC Low Density"
  rect 0.9x1.05 smd: 1(-0.675,0) 2(0.675,0)
  body extent -0.82,-0.48 0.82,0.48, height 0.5
RESC1609X55X30LL15T15 [mm] "Chip Resistor, 2-Leads, Body 1.75x0.95mm, IPC High Density"
  rect 0.75x0.85 smd: 1(-0.65,0) 2(0.65,0)
  body extent -0.87,-0.48 0.87,0.48, height 0.55
RESC3216X70X50LL05T20 [mm] "Chip Resistor, 2-Leads, Body 3.20x1.60mm, IPC High Density"
  rect 0.9x1.55 smd: 1(-1.325,0) 2(1.325,0)
  silkscreen extent -0.5,-0.67 0.5,0.67, body extent -1.63,-0.82 1.62,0.82, height 0.7
WE-PD2-XL [mm] "SMD Inductor, 2-Leads, Body 10.0 x 9.0 mm"
  rect 3.75x9.5 smd: 1(-3.125,0) 2(3.125,0)
  silkscreen extent -1.12,-4.5 1.12,4.5, body extent -5.04,-4.5 5.04,4.5, height 5.39

## Part data
C1 C6: library part CMP-08246-002727-1, "Multilayer Ceramic Capacitors 1μF ±10% 16V X7R SMD 0603", Case Code (Imperial)=0603, Case Code (Metric)=1608, Dielectric=X7R, Dielectric Material=Ceramic, Max Operating Temperature=125°C, Min Operating Temperature=-55°C, Package Quantity=1, Tolerance=10%, Voltage=16V, Capacitance=1uF, Case/Package=0603, Construction=Flat, Depth=0.8mm, Height=0.8mm, Lead Free="Lead Free", Length=1.6mm, Mount="Surface Mount", Packaging="Tape and Reel", Radiation Hardening=No, REACH SVHC="No SVHC", Resistor Type=Ceramic, RoHS Compliant=Yes, Series=C, Termination=SMD/SMT, Thickness=0.037inch, Voltage Rating=16V, Voltage Rating (DC)=16V, Weight=7.1E-05oz, Width=0.031inch
C2 C3: library part CMP-1664-00014-1, "Tantalum Surface Mount Capacitor-Standard Tantalum, 47 uF, +/- 10%, 16 V, -55 to 125 degC, 2-Pin SMD, RoHS, Tape and Reel", Capacitance="10 uF", Case Code (Imperial)=1206, Case Code (Metric)=3216, Max Operating Temperature=125degC, Min Operating Temperature=-55degC, Package Quantity=1, Tolerance=10%, Voltage Rating="16 V", Case/Package=1206, ComponentLink1Description="Manufacturer URL", ComponentLink1URL=http://www.kemet.com/, ComponentLink2Description=Datasheet, ComponentLink2URL=http://www.kemet.com/Lists/ProductCatalog/Attachments/254/KEM_T2005_T491.pdf, DatasheetVersion=Jun-16, ESR="3 Ohm", Height="1.8 mm", Length="3.2 mm", Mount="Surface Mount", PackageDescription="2-Pin Surface Mount Device, Body 7.3 x 4.3 mm", PackageReference=T491-D, Packaging="Cut Tape", Pins=2, Radiation Hardening=No, REACH SVHC="No SVHC", RoHSCompliant=True, Width="1.6 mm"
C4 C21 C26: library part CMP-2000-07197-3, "CAP TANT 10UF 10% 16V 2312", Case Code (Imperial)=2312, Case Code (Metric)=6032, Case/Package=Molded, Dielectric Material=Tantalum, ESR (Equivalent Series Resistance)=1.8R, Leakage Current=1.6uA, Max Operating Temperature=125°C, Min Operating Temperature=-55°C, Package Quantity=1, Ripple Current=247mA, Tolerance=10%, Voltage=16V, Capacitance=10uF, Depth=3.2mm, Dissipation Factor=6%, Features="General Purpose", Height=2.5mm, Height - Seated (Max)=0.11inch, Lead Free="Lead Free", Length=6mm, Life (Hours)=2000Hour, Mount="Surface Mount", Packaging="Tape and Reel", Polarity=Polar, Radiation Hardening=No, REACH SVHC="No SVHC", RoHS Compliant=Yes, Termination=SMD/SMT, Voltage Rating=16V, Voltage Rating (DC)=16V, Width=3.2mm
C5: library part CMP-2000-07200-2, "CAP TANT 10UF 10% 25V 2917", Case Code (Imperial)=2917, Case Code (Metric)=7343, Dielectric Material=Tantalum, ESR (Equivalent Series Resistance)=1R, Leakage Current=2.5uA, Max Operating Temperature=125°C, Min Operating Temperature=-55°C, Package Quantity=1, Ripple Current=387mA, Tolerance=20%, Voltage=25V, Capacitance=10uF, Case/Package=2917, Depth=4.3mm, Dissipation Factor=6%, Features="General Purpose", Height=2.8mm, Height - Seated (Max)=0.122inch, Lead Free="Lead Free", Length=7.3mm, Life (Hours)=2000Hour, Mount="Surface Mount", Number of Pins=2, Packaging="Tape and Reel", Polarity=Polar, Radiation Hardening=No, REACH SVHC="No SVHC", Termination=SMD/SMT, Voltage Rating=25V, Voltage Rating (DC)=25V, Width=4.3mm
C7 C8: library part CMP-2000-06037-3, "Multilayer Ceramic Capacitors 22μF ±10% 16V X5R SMD 0805", Case Code (Imperial)=0805, Case Code (Metric)=2012, Dielectric=X5R, Dielectric Material=Ceramic, Max Operating Temperature=85°C, Min Operating Temperature=-55°C, Package Quantity=1, Tolerance=10%, Voltage=16V, Capacitance=22uF, Case/Package=0805, Construction=Flat, Depth=1.25mm, Height=1.25mm, Lead Free="Lead Free", Length=2mm, Mount="Surface Mount", Number of Pins=2, Packaging="Tape and Reel", REACH SVHC="No SVHC", Resistor Type=Ceramic, RoHS Compliant=Yes, Series=C, Termination=Wraparound, Thickness=0.057inch, Voltage Rating=16V, Voltage Rating (DC)=16V, Weight=0.000194oz, Width=0.049inch
C9 C10 C11 C12 C13: library part CMP-2008-04599-2, "CAP CER 0.1UF 16V X7R 0402", Capacitance=100nF, Case Code (Imperial)=0402, Case Code (Metric)=1005, Dielectric=X7R, Max Operating Temperature=125°C, Min Operating Temperature=-55°C, Package Quantity=10000, Tolerance=5%, Voltage=16V, Case/Package=0402, Depth=0.5mm, Height=0.5mm, Lead Free="Lead Free", Length=1mm, Mount="Surface Mount", Packaging="Cut Tape", Radiation Hardening=No, REACH SVHC="No SVHC", RoHS Compliant=Yes, Series=GRM, Termination=Standard, Thickness=0.022inch, Voltage Rating=16V, Voltage Rating (DC)=16V, Weight=0.000212oz, Width=0.5mm
C14 C15 C16 C17 C18 C19 C27: library part CMP-2000-07546-2, "Cap Ceramic 100nF 50V X7R 10% Pad SMD 0603 +125°C Automotive T/R", Case Code (Imperial)=0603, Case Code (Metric)=1608, Dielectric=X7R, Max Operating Temperature=125°C, Min Operating Temperature=-55°C, Package Quantity=1, Ratings=AEC-Q200, Tolerance=10%, Voltage=50V, Capacitance=100nF, Case/Package=0603, Composition=Ceramic, Depth=0.8mm, Height=0.8mm, Lead Free="Lead Free", Length=1.6mm, Mount="Surface Mount", Packaging="Tape and Reel", Radiation Hardening=No, REACH SVHC="No SVHC", Termination=SMD/SMT, Thickness=0.035inch, Voltage Rating=50V, Voltage Rating (DC)=50V, Weight=7.1E-05oz, Width=0.8mm
C20: library part CMP-2006-04559-3, "General Purpose Ceramic Capacitor, 0603, 1uF, 10%, X5R, 15%, 10V", Case Code (Imperial)=0603, Case Code (Metric)=1608, Dielectric=X5R, Insulation Resistance=100GR, Max Operating Temperature=85°C, Min Operating Temperature=-55°C, Package Quantity=4000, Tolerance=10%, Voltage=10V, Capacitance=1uF, Case/Package=0603, Construction=Flat, Contact Plating=Tin, Depth=0.81mm, Dissipation Factor=5%, Height=0.9mm, Lead Free="Lead Free", Length=1.6mm, Mount="Surface Mount", Number of Pins=2, Packaging="Tape and Reel", Radiation Hardening=No, REACH SVHC="No SVHC", RoHS Compliant=Yes, Series=-, Termination=SMD/SMT, Thickness=0.035inch, Voltage Rating=10V, Voltage Rating (DC)=10V, Width=0.81mm
C22 C23 C24 C25: library part CMP-06035-060818-1, "100pF ±10%  250VAC Ceramic Capacitor X7R 1808 (4520 Metric)", Case Code (Imperial)=1808, Case Code (Metric)=4520, Dielectric=X7R, Max Operating Temperature=125°C, Min Operating Temperature=-55°C, Package Quantity=2000, Tolerance=10%, Voltage=250V, Capacitance=100pF, Case/Package=1808, Depth=2mm, Height=1.5mm, Lead Free="Lead Free", Length=4.5mm, Mount="Surface Mount", Number of Pins=2, Packaging="Tape and Reel", Radiation Hardening=No, REACH SVHC="No SVHC", Termination=SMD/SMT, Thickness=0.059inch, Voltage Rating=250V, Voltage Rating (AC)=250V, Voltage Rating (DC)=250V, Width=0.079inch
D1 D2: library part CMP-12790-000060-1, "DIODE SCHOTTKY 40V 700MA SOT23-3", Average Rectified Current=700mA, Capacitance=16pF, Case/Package=SOT-23, Forward Voltage=800mV, Max Forward Surge Current (Ifsm)=3.2A, Max Operating Temperature=150°C, Max Repetitive Reverse Voltage (Vrrm)=40V, Min Operating Temperature=-55°C, Package Quantity=3000, Peak Non-Repetitive Surge Current=13A, Peak Reverse Current=10uA, Power Dissipation=500mW, Current Rating=700mA, Element Configuration=Single, Forward Current=700mA, Height=1mm, Lead Free="Lead Free", Length=3.05mm, Max Reverse Voltage (DC)=40V, Mount="Surface Mount", Number of Pins=3, Output Current=700mA, Packaging="Tape and Reel", Polarity=Standard, Radiation Hardening=No, Reverse Recovery Time=3ns, Termination=SMD/SMT, Voltage Rating (DC)=40V, Weight=0.000282oz, Width=1.4mm
D3: library part CMP-1060-00402-1, "Zener Voltage Regulator, 500 mW, 2-Pin SOD-123, Pb-Free, Tape and Reel", Manufacturer="On Semiconductor", ComponentLink1Description="Manufacturer URL", ComponentLink1URL=http://www.onsemi.com/, ComponentLink2Description=Datasheet, ComponentLink2URL=http://www.onsemi.com/pub_link/Collateral/MMSZ2V4T1-D.PDF, ComponentLink3Description="Package Specification", ComponentLink3URL=http://www.onsemi.com/pub_link/Collateral/425-04.PDF, DatasheetVersion="Rev. 11", Mounting Technology="Surface Mount", P Max (W)=0.5, PackageDescription="2-Pin SOD, Body 1.6 x 2.69 mm", PackageReference=SOD-123-2-425-04, PackageVersion="Rev. G, 10/2009", Packing="Tape and Reel", PartNumber=MMSZ11T1G, RoHS=Pb-Free
F4: library part CMP-08605-000058-1, "FUSE BOARD MNT 1A 63VAC/VDC 1206", Fuse Current=1A, Fuse Interrupt Ac Current=50A, Fuse Voltage Drop=79.97mV, Manufacturer="Littelfuse Inc", Max Fuse Ac Voltage=63V, Package=0466, Resistance=0.075Ω, Temperature="-55°C to +90°C", Temperature Range High=+90°C, Temperature Range Low=-55°C, Automotive=No, Category=Fuse, ComponentLink2Description=Datasheet, ComponentLink2URL=https://www.littelfuse.com/~/media/electronics/datasheets/fuses/littelfuse_fuse_466_datasheet.pdf.pdf, Device Class L1="Circuit Protection", Device Class L2=Fuses, Device Class L3=unset, Digikey Description="FUSE BOARD MNT 1A 63VAC/VDC 1206", Fuse Blow Speed=Fast, Fuse I2T=0.0423A2Sec, Fuse Interrupt Dc Current=50A, Height=0.66mm, Lead Free=Yes, Manufacturer Part Number=0466001.NR, Max Fuse Dc Voltage=63V, Mouser Description="Surface Mount Fuses 63V FA 1206 1A VFA Slimline", Octopart=https://octopart.com/0466001.nr-littelfuse-566005, RoHS=TRUE, Voltage Rating=63V
J1 J2 J3 J4 J5 J6 J7 J8 J9 J10 J11 J12 J13: library part CMP-2000-05182-2, "PC TEST POINT MINIATURE WHITE", Color=White, Flammability Rating="UL94 V-0", Package Quantity=100, Body Material=Bronze, Contact Material=Bronze, Contact Plating=Silver, Hole Diameter=1.6mm, Housing Color=White, Inside Diameter=1.27mm, Insulation=Insulated, Lead Free="Lead Free", Length=7.62mm, Material=Nylon, Mount="Through Hole", Number of Ports=1, Orientation=Straight, Outside Diameter=2.54mm, Packaging=Bulk, Plating=Silver, REACH SVHC="No SVHC", RoHS Compliant=Yes, Series=THM
L1: library part CMP-0227-00489-1, "SMD Power Inductor WE-PD2, L = 68.0 µH", Inductance="68.0 ÂµH", ComponentLink1Description="Manufacturer Link", ComponentLink1URL=http://www.we-online.com, ComponentLink2Description=Datasheet, ComponentLink2URL=http://www.we-online.de/katalog/media/pdf/744776168.pdf, DatasheetVersion="ver 1, Oct-2004", PackageDescription="SMD Inductor, 2-Leads, Body 10.0 x 9.0 mm", PackageReference=WE-PD2-XL, PackageVersion=2004
L2: library part CMP-0007-00001-1, "Semi-shielded Power Inductor, 3.3 uH, +/- 20%, 1.6 A, -40 to 125 degC, 3 x 3 x 1.5 mm SMD, RoHS and Halogen Free, Tape and Reel", Inductance="3.3 uH", Inductance tolerance="+/- 20%", Manufacturer=Bourns, Operating Temperature="-40 to 125 degC", PartNumber=SRN3015-3R3M, Rated current="1.6 A", Resistance to Solder Heat="+260 degC for 10 sec.", ComponentLink1Description="Manufacturer URL", ComponentLink1URL=http://www.bourns.com/, ComponentLink2Description=Datasheet, ComponentLink2URL=http://www.bourns.com/data/global/pdfs/SRN3015.pdf, ComponentLink3Description="Package Specification", ComponentLink3URL=http://www.bourns.com/data/global/pdfs/SRN3015.pdf, DatasheetVersion=Aug-11, DCR Max="0.112 Ohm", Isat="1.4 A", Mounting Technology="Surface Mount", PackageDescription="2-Pin SMD, Body 3 x 3 mm, Height 1.5 mm", PackageReference=SRN3015, Packing="Tape and Reel", RoHS=TRUE, SRF Min="75 MHz"
MD1: library part CMP-20596-000009-1, "DC DC CONVERTER 5V 2W", RoHS Compliant=Yes
MH1 MH2 MH3 MH4: library part "Mounting Hole"
Q1: library part CMP-1099-00052-1, "P-Channel SIPMOS Power-Transistor, -100 V VDS, -15 A ID, -55 to 175 degC, PG-TO252-3-1, Reel, Green", Manufacturer=Infineon, ComponentLink1Description="Manufacturer URL", ComponentLink1URL=http://www.infineon.com/, ComponentLink2Description=Datasheet, ComponentLink2URL=http://www.infineon.com/dgdl/SPD15P10PL%2BG_Rev1.5.pdf?folderId=db3a304314dca38901154a72e3951a65&fileId=db3a30433c1a8752013c39ff5f2e4af3, ComponentLink3Description="Package Specification", ComponentLink3URL=http://www.infineon.com/dgdl/TLE42744_DS_11.pdf?folderId=db3a304318f3fe290118f5a433570040&fileId=db3a304327b897500128012ccafe37d2&sId=db3a30443d67b5ca013d83f7c0ea327b, DatasheetVersion="Rev. 1.5", Green=TRUE, ID (max)="-15Â A", IDpuls (max)="-60Â A", Mode=Enhancement, Mounting Technology="Surface Mount", PackageDescription="3-Pin Plastic (Green) Transistor Single Outline Package, 6.5 x 6.12 mm Body, 2.28 mm Pitch", PackageReference=PG-TO252-3-1, PackageVersion=Jan-10, Packing=Reel, PartNumber="SPD15P10PL G", Polarity=P, Pto t (max)="128Â W", QG="47Â nC", RDS (on) (max)="200Â mOhm", RDS (on) (max) (@4.5V)="270Â mOhm", Rth="1.17Â K/W", Technology=SIPMOS, VDS (max)="-100Â V", VGS(th) (max)="-2Â V", VGS(th) (min)="-1Â V"
Q2: library part CMP-2000-06260-1, "Single N-Channel, Logic-Level, PowerTrench(R) MOSFET, 11 A, 30 V, -55 to 150 degC, 8-Pin SOIC (SO-8), RoHS, Tape and Reel", Manufacturer="Fairchild Semiconductor", Maximum Continuous Drain Current=11A, Maximum Drain Source Resistance=0.013Ω, Maximum Drain Source Voltage=30V, Maximum Gate Source Voltage=±20V, Maximum Operating Temperature=+150°C, Maximum Power Dissipation=2.5W, Minimum Gate Threshold Voltage=1V, Minimum Operating Temperature=-55°C, Package Description="8-Pin Small Outline Integrated Circuit, Body 4.9 x 3.9 mm, Pitch 1.27 mm", Package Reference=SOIC-8, Package Type=SOIC, Typical Input Capacitance @ Vds=1205pF@15V, Category=PowerMOSFET, Channel Mode=Enhancement, Channel Type=N, Datasheet URL=https://www.fairchildsemi.com/datasheets/FD/FDS6690A.pdf, Datasheet Version="Rev. E1, 02/2007", Dimensions=5x4x1.5mm, Height=1.5mm, Length=5mm, Manufacturer URL=https://www.fairchildsemi.com/, Mounting Technology=SurfaceMount, Mounting Type=SurfaceMount, Number of Elements per Chip=1, Package URL=https://www.fairchildsemi.com/package-drawings/M0/M08A.pdf, Pin Count=8, Transistor Configuration=Single, Transistor Material=Si, Typical Gate Charge @ Vgs=12nC@5V, Typical Turn-Off Delay Time=28ns, Typical Turn-On Delay Time=9ns, Width=4mm
R1 R2 R11 R12 R13: library part CMP-1012-00623-3, "Chip Resistor, 10 KOhm, +/- 1%, 0.1 W, -55 to 155 degC, 0603 (1608 Metric), RoHS, Tape and Reel", Case Code (Imperial)=0603, Case Code (Metric)=1608, Manufacturer=Panasonic, Max Operating Temperature=155degC, Max Power Dissipation=100mW, Min Operating Temperature=-55degC, Package Description="2-Pin Surface Mount Device, Body 1.6 x 0.85 mm", Package Quantity=1, Package Reference=603, Resistance=10KOhm, Temperature Coefficient=100ppm\/degreesC, Tolerance=1%, Voltage Rating=75V, Case\/Package=0603, Composition=ThickFilm, Contact Plating=Tin, Datasheet URL=https://industrial.panasonic.com/cdbs/www-data/pdf/RDA0000/AOA0000C304.pdf, Datasheet Version=02/2017, Depth=0.8mm, Height=0.45mm, Lead Free=LeadFree, Length=1.6mm, Manufacturer URL=http://www.panasonic.com/, Military Standard=Not, Mount=SurfaceMount, Mounting Technology=SurfaceMount, Number of Pins=2, Number of Terminations=2, Packaging=TapeandReel, Power Rating=100mW, Radiation Hardening=No, REACH SVHC=NoSVHC, RoHSCompliant=true, Termination=SMD/SMT, Voltage Rating (DC)=75V, Width=0.031inch
R3 R4 R5 R10: library part CMP-2003-00694-1, Manufacturer=Panasonic, Part Number=ERJ-8RQFR22V
R6 R21 R22 R23 R24 R25 R26 R27 R28 R29 R30 R31 R32: library part CMP-2000-00523-2, "Chip Resistor, 47 KOhm, +/- 1%, 0.1 W, -55 to 155 degC, 0603 (1608 Metric), RoHS, Tape and Reel", Case Code (Imperial)=0603, Case Code (Metric)=1608, Colour=Red, Forward Current="20 mA", Forward Voltage="2.1 V", Max Operating Temperature="100 degC", Min Operating Temperature="-40 degC", Package Quantity=3000, Power Rating="90 mW", Case\Package=0603, ComponentLink1Description="Manufacturer URL", ComponentLink1URL=http://www.panasonic.com/, ComponentLink2Description=Datasheet, ComponentLink2URL=http://industrial.panasonic.com/cdbs/www-data/pdf/RDA0000/AOA0000C86.pdf, DatasheetVersion=Apr-15, Height="0.6 mm", Illumination Colour=Red, Length="1.6 mm", Lens Style=Clear, Luminous Intensity="63 mcd", Mount="Surface Mount", Nominal Vf="2.1 V", Nominal Wavelength="639 nm", PackageDescription="2-Pin Surface Mount Device, Body 1.6 x 0.85 mm", PackageReference=0603, Packaging="Tape and Reel", Pins=2, Radiation Hardening=No, REACH SVHC="No SVHC", RoHSCompliant=true, Viewing Angle="160 degrees", Width="0.8 mm"
R7 R33: library part CMP-07234-000035-1, "TRIMMER 10K OHM 0.25W J LEAD TOP", RoHS Compliant=Yes
R8 R9: library part CMP-1659-00037-1, "Chip Resistor, 220 KOhm, +/- 1%, 100 mW, -55 to 155 degC, 0603 (1608 Metric), RoHS, Tape and Reel", Max Operating Temperature="70 degC", Min Operating Temperature="-25 degC", Resistance="0.1 Ohm", ComponentLink1Description="Manufacturer URL", ComponentLink1URL=http://www.yageo.com/, ComponentLink2Description=Datasheet, ComponentLink2URL=http://www.yageo.com/documents/recent/PYu-RC_Group_51_RoHS_L_04.pdf, DatasheetVersion="Rev. 4, 02/2016", Height="0.25 inch", Length="0.75 inch", PackageDescription="2-Pin Surface Mount Device, Body 1.6 x 0.8 mm", PackageReference=0603, REACH SVHC="No SVHC", RoHSCompliant=true, Width="0.25 inch"
R14 R15: library part CMP-2000-03545-1, Manufacturer="Vishay Dale", Part Number=CRCW06036K20FKEA
R16: library part CMP-2000-00182-1, Manufacturer=Panasonic, Part Number=ERJ-3EKF1003V
R17 R19 R20: library part CMP-2000-00180-1, Manufacturer=Panasonic, Part Number=ERJ-3EKF1001V
R18: library part CMP-2000-00416-1, Manufacturer=Panasonic, Part Number=ERJ-3EKF3011V
R35 R36 R37 R38: library part CMP-02407-000053-1, "RES 1M OHM 1% 1/10W 0603", Case/Package=Molded, Max Operating Temperature=155°C, Min Operating Temperature=-55°C, Power Rating=100mW, Resistance=1MR, Temperature Coefficient=100ppm/°C, Tolerance=1%, Composition="Thick Film", Contact Plating=Tin, Lead Free="Lead Free", Length=1.55mm, Mount="Surface Mount", Termination=Wraparound
U1: library part CMP-0473-00061-1, "Power Tracking 2 A Battery Charger for Solar Power, 12-pin SON (DD-12), -40 to 125 degC, Pb-Free", Manufacturer="Linear Technology", ComponentLink1Description="Manufacturer URL", ComponentLink1URL=http://www.linear.com/, ComponentLink2Description=Datasheet, ComponentLink2URL=http://cds.linear.com/docs/en/datasheet/3652fd.pdf, ComponentLink3Description="Package Specification", ComponentLink3URL=http://cds.linear.com/docs/en/packaging/DFN_12_05-08-1725.pdf, DatasheetVersion="Rev. D", Energy Source=Solar, Mounting Technology="Surface Mount", Number of Outputs=1, PackageDescription="12-Pin Plastic DFN, Body 3 x 3 mm, Pitch 0.45 mm", PackageReference=DD-12, PackageVersion="Rev. A, 06/2010", PartNumber=LT3652EDD#PBF, RoHS=TRUE, Topology="Battery Charger", Vin Max(V)=32, Vin Min(V)=4.95
U2: library part CMP-0478-00217-1, "Switching Power Manager with USB On-The-Go And Overvoltage Protection, 4.35 to 5.5 V Vin, 20-pin QFN (UDC-20), -40 to 85 degC, Pb-Free", Manufacturer="Linear Technology", ComponentLink1Description="Manufacturer URL", ComponentLink1URL=http://www.linear.com/, ComponentLink2Description=Datasheet, ComponentLink2URL=http://cds.linear.com/docs/en/datasheet/41601fa.pdf, ComponentLink3Description="Package Specification", ComponentLink3URL=http://cds.linear.com/docs/en/packaging/QFN_20_05-08-1742.pdf, DatasheetVersion="Rev. A", Mounting Technology="Surface Mount", Number of Cells=1, Number of Outputs=1, PackageDescription="20-Pin Plastic QFN, Body 3 x 4 mm, Pitch 0.5 mm", PackageReference=UDC20, PackageVersion="Rev. Ã˜, 06/2010", PartNumber=LTC4160EUDC#PBF, RoHS=TRUE, Vin Max(V)=5.5, Vin Min(V)=4.35
U3 U4 U5 U6: library part CMP-2000-05026-1, "Intelligent Control LED Integrated Light Source, 3.5 to 5.3 V, -25 to 80 degC, 4-Pin SMD, RoHS, Tape and Reel", Color=Red,Green,Blue(RGB), Manufacturer=Adafruit-Industries-LLC, Package Description="4-Pin Surface Mount Device, Body 5 x 5 mm", Category=Optoelectronics, Configuration=Discrete, Controller Type=-, Datasheet URL=http://datasheet.octopart.com/ADA1655-Adafruit-Industries-datasheet-32028139.pdf, Datasheet Version=May-13, Family=Addressable,Specialty, Interface=-, Manufacturer URL=https://www.adafruit.com/, Mounting Type=SurfaceMount, Number of LEDs=10, Package Reference=1655, Series=Neopixel, Size / Dimension=5.00mmLx5.00mmW, Utilized LED=WS2812(5050)
U7 U9 U10: library part CMP-04895-000140-1, "IC CURR SENSE 1 CIRCUIT SOT23-5", Case/Package=SOT-23-5, Input Bias Current=100nA, Input Offset Voltage (Vos)=100uV, Max Operating Temperature=125°C, Min Operating Temperature=-40°C, Operating Supply Current=260uA, -3db Bandwidth=350kHz, Mount="Surface Mount", Number of Circuits=1, Packaging="Tape and Reel", Slew Rate=2V/µs
U8: library part CMP-0017-00003-2, "Quad Low-Noise JFET-Input General-Purpose Operational Amplifier, 7 to 36 V, 0 to 70 degC, 14-pin SOIC (D14), Green (RoHS & no Sb/Br)", Manufacturer="Texas Instruments", Rating=Military, Total Supply Voltage(Max)(+5V is 5, +/-5V is 10)=36, Total Supply Voltage(Min)(+5V is 5, +/-5V is 10)=7, CMRR(Min)(dB)=70, Code_JEDEC=MS-012, ComponentLink1Description="Manufacturer URL", ComponentLink1URL=http://www.ti.com/, ComponentLink2Description=Datasheet, ComponentLink2URL=http://www.ti.com/lit/ds/symlink/tl074.pdf, ComponentLink3Description="Package Specification", ComponentLink3URL=http://www.ti.com/lit/ml/mpds177g/mpds177g.pdf, DatasheetVersion=SLOS080J, Eco-Plan="Green (RoHS & no Sb/Br)", GBW(Typ)(MHz)=3, IIB(Max)(pA)=200, Iq per channel(Max)(mA)=2.5, Mounting Technology="Surface Mount", Number of Channels=4, Offset Drift(Typ)(uV/C)=18, PackageDescription="14-Pin Plastic Small Outline, Body 8.65 x 3.90 mm, Pitch 1.27 mm", PackageReference=D0014A, PackageVersion="4040047-5/M, 06/2011", PartNumber=TL074CDR, Slew Rate(Typ)(V/us)=13, Sub Family="General Purpose Amplifier, High Supply Voltage Amplifier (>=30V)", Vio (25C)(Max)(mV)=10, Vn at 1kHz(Typ)(nV/rtHz)=18

## Free pads (board coordinates)
  round 1.524 hole 0.762: 2(63.1,50.2)

## Via types
v1: diameter 0.5, hole 0.3, Top Layer to Bottom Layer, 27 vias
v2: diameter 0.5, hole 0.2, Top Layer to Bottom Layer, 6 vias

## Nets (pads, with @x,y where several pads share a name; then routed paths per layer and width w, separated by ;. In a path a pad name is that pad's centre, name@x,y a point inside that pad or via, vN(x,y) a via of type N, cw(c..) or ccw(c..) an arc to the next point about the centre after c; other vN are vias at no path point)
3V3: J3.1 R1.1 R2.1 R11.2 R12.2 R13.2 R33.1 | length 45.3
  Top Layer w0.254: v1(38.5,43.9) 38.518,43.882 38.518,43.061 R1.1 38.543,43.036 38.543,41.707 R2.1 ; R13.2 57.847,48.772 v1(57.847,49.933) ; R11.2 R12.2 v1(64.6,45.6) ; J3.1 R33.1
  Int2 (Sign) w0.254: v1(38.5,43.9) 44.533,49.933 v1(57.847,49.933) 57.847,50.747 58.289,51.189 64.011,51.189 64.6,50.6 v1(64.6,45.6)
5V: C14.1 C16.1 C18.1 C21.2 C27.2 MD1.1 U7.5 U8.4 U9.5 U10.5 | length 148.7
  Top Layer w0.7: U7.5 27.918,57.723 27.874,57.767 27.874,59.251 C27.2 v1(29.3,59.3) ; U10.5 C14.1 47.563,41.475 v1(47.601,41.513) ; v1(56.1,61.8) 56.15,61.75 U9.5 56.175,59.775 57.75,59.775 C16.1 ; v1(65.1,61.8) 74,61.8 76.2,64 76.2,71.85 73.395,74.655 MD1.1 73.395,77.235 73.845,77.685 73.915,77.685 74.56,78.33 C21.2 73.96,79 73.96,80.515 73.5,80.975 C18.1 ; v1(80.1,42.3) U8.4
  Int2 (Sign) w0.7: v1(29.3,59.3) 31.8,61.8 v1(56.1,61.8) v1(65.1,61.8) ; v1(47.601,41.513) 48.238,42.15 58.95,42.15 61.4,44.6 74.7,44.6 77.3,42 79.8,42 v1(80.1,42.3)
  Int3 (Sign) w0.7: v1(65.1,61.8) 66.8,60.1 77.8,60.1 82,55.9 82,44.2 v1(80.1,42.3)
-5V: C15.1 C17.1 C19.1 C26.1 MD1.5 U7.2 U9.2 U10.2 | length 89.1
  Top Layer w0.254: C15.1 23.952,56.773 U7.2 25.635,56.786 29.486,56.786 31.4,58.7 v1(31.4,59.1) ; v1(42.8,44.4) 41.6,43.2 C17.1 U10.2 ; v1(51.9,58.7) 51.967,58.7 52.067,58.8 U9.2 ; v1(57.9,72.6) 62.1,72.6 63.3,73.8 63.3,75.24 MD1.5
  Top Layer w0.7: U9.2 57.057,58.8 57.111,58.747 57.237,58.747 57.331,58.653 57.647,58.653 57.775,58.525 C19.1 ; MD1.5@63.285,75.355 63.285,76.739 65.174,78.628 C26.1
  Int2 (Sign) w0.254: v1(31.4,59.1) 51.433,59.1 51.833,58.7 v1(51.9,58.7)
  Int3 (Sign) w0.254: v1(42.8,44.4) 51.9,53.5 v1(51.9,58.7) 51.9,66.6 v1(57.9,72.6)
BCAP: C1.1 D1.1 L1.1 U1.12
C\H\R\G\: R1.2 U1.4 | length 8.7
  Top Layer w0.254: U1.4 39.4,50.3 39.835,49.865 R1.2
ENOTG: pad.2 U2.6 | length 7.1
  Top Layer w0.254: U2.6 59.938,44.65 59.959,44.671 59.959,44.909 60.746,45.696 60.746,46.777 63.1,49.131 pad.2
F\A\U\L\T\: R2.2 U1.5 | length 10.2
  Top Layer w0.254: R2.2 39.85,41.75 40.5,42.4 40.5,49.9 39.849,50.551 U1.5@39.849,51.377
GND: C2.2 C3.2 C4.1 C5.1 C6.1 C7.2 C8.2 C9.2 C10.2 C11.2 C12.2 C13.2 C14.2 C15.2 C16.2 C17.2 C18.2 C19.2 C20.2 C21.1 C22.1 C23.1 C24.1 C25.1 C26.2 C27.1 D1.3 MD1.2 MD1.6 MD1.11 R7.3 R9.1 R15.1 R17.1 R18.1 R19.1 R21.2 R25.2 R29.2 R33.3 R35.2 R36.2 R37.2 R38.2 U1.13 U2.7 U2.21 U3.3 U4.3 U5.3 U6.3 U8.11 | length 13.1
  Top Layer w0.7: C26.2 60.575,78.578 60.575,75.425 MD1.6 ; C21.1 70.485,77.755 70.485,76.961 70.805,76.641 70.805,75.355 MD1.2 70.855,80.38 71.45,80.975 C18.2
  other v2: 58.2,42.85 58.2,43.95 38.675,52.5 39.675,52.5 38.675,53.5 39.675,53.5
I_BATT: R27.2 U9.1 | length 48.3
  Top Layer w0.7: U9.1 53.85,62.839 54.26,63.25 60.05,63.25 64.3,59 66,59 68.35,56.65 68.35,42.05 71.5,38.9 78.3,38.9 78.8,39.4 R27.2
I_BATT_SNS: J11.1 R26.1 U8.1 | length 6.2
  Top Layer w0.254: J11.1 74.426,44.597 76.117,44.597 76.29,44.424 U8.1 76.29,42.44 ; R26.1 R26.1@75.99,42.34
I_BUS: R31.2 U10.1 | length 44.5
  Top Layer w0.7: U10.1 v1(43.4,41.9) ; R31.2 v1(78.8,54.9)
  Int3 (Sign) w0.7: v1(43.4,41.9) 43.4,42.1 51.933,50.633 60.433,50.633 64.7,54.9 v1(78.8,54.9)
I_BUS_SNS: J12.1 R30.1 U8.14 | length 5.6
  Top Layer w0.254: J12.1 U8.14 76.29,50.86 R30.1
I_PV: R23.2 U7.1 | length 76
  Top Layer w0.254: U7.1 26.218,57.723 26.795,57.146 28.746,57.146 v1(29.9,58.3) ; R23.2 81.4,40.264 v1(81.4,38.3)
  Int2 (Sign) w0.254: v1(29.9,58.3) 45.933,58.3 48.856,55.377 79.023,55.377 82.1,52.3 82.1,39 v1(81.4,38.3)
I_PV_SNS: J10.1 R22.1 U8.7 | length 5.5
  Top Layer w0.254: R22.1 83.91,42.44 U8.7 83.96,44.1 J10.1@86.9,44.1
ILIM0: U2.15
ILIM1: U2.16
NetC1_2: C1.2 D2.1 U1.11 | length 5.4
  Top Layer w0.254: C1.2 38.15,59.5 38.479,59.171 38.479,59.043 38.5,59.022 38.5,56.615 U1.11
NetC6_2: C6.2 U1.6 | length 1.5
  Top Layer w0.254: U1.6 40.3,51.379 40.302,51.377 40.573,51.377 41.2,50.75 C6.2
NetC8_1: C8.1 J5.1 Q2.1 Q2.2 Q2.3 U2.13 | length 7.1
  Top Layer w0.254: v1(55.9,43.65) U2.13
  Int2 (Sign) w0.254: v1(55.9,43.65) v1@55.9,43.7
  Bottom Layer w0.254: J5.1 54.85,44.7 v1(55.9,43.65)
  other v1: 64.3,41.85 65.7,41.9 64.3,42.95 65.6,43
NetC9_1: C9.1 R18.2 U2.17 | length 2.7
  Top Layer w0.254: R18.2 56.15,40.755 56.275,40.88 C9.1 57.168,40.88 57.45,41.162 U2.17
NetD3_1: D3.1 J4.1 Q1.3 Q2.5 Q2.6 Q2.7 Q2.8 R14.2 | length 5
  Top Layer w0.254: Q2.7 J4.1
NetD3_2: D3.2 Q1.1 R15.2
NetF4_2: F4.2 R10.1 | length 1.8
  Top Layer w0.7: F4.2 R10.1
NetJ8_1: J8.1 U2.5 | length 5.3
  Top Layer w0.254: U2.5 60.35,44.15 61.1,44.9 61.1,45.7 J8.1
NetJ9_1: J9.1 R20.2 | length 3.9
  Top Layer w0.254: R20.2 J9.1
NetL1_2: L1.2 R4.1 U1.10
NetL2_1: L2.1 U2.14
NetP4_2: R11.1 U2.3 | length 3.1
  Top Layer w0.254: U2.3 60.85,43.15 61.76,44.06 62.11,44.06 R11.1
NetP4_3: R12.1 U2.4 | length 3.5
  Top Layer w0.254: U2.4 60.45,43.65 62.35,45.55 R12.1
NetP4_4: R13.1 U2.9 | length 2.1
  Top Layer w0.254: R13.1 57.95,47.325 U2.9
NetR6_1: R6.1 R8.1 R9.2 | length 3.1
  Top Layer w0.254: R8.1 41.5,52.45 42.3,53.25 R6.1 R9.2
NetR8_2: R8.2 U1.7 | length 1.4
  Top Layer w0.254: U1.7 40.75,54.4 40.899,54.251 40.899,54.151 41.3,53.75 R8.2@41.4,53.75
NetR16_1: R16.1 U2.19 | length 2.8
  Top Layer w0.254: R16.1 57.125,39.439 57.448,39.762 57.749,39.762 57.898,39.91 57.898,39.999 58.031,40.132 58.202,40.132 58.45,40.38 U2.19
NetR16_2: R16.2 R17.2 U2.20 | length 4.7
  Top Layer w0.254: R16.2@58.85,39.08 58.85,40.38 58.873,40.403 58.873,40.934 58.941,41.003 58.941,41.391 U2.20 60.08,41.4 60.875,40.605 R17.2
NetR19_2: R19.2 U2.8 | length 2.4
  Top Layer w0.254: U2.8 58.459,45.409 58.459,46.159 59.125,46.825 R19.2
NetR20_1: R20.1 U3.4 | length 1.9
  Top Layer w0.254: U3.4 71.541,22.534 72.62,22.534 R20.1
NetR21_1: R21.1 R22.2 U8.6 | length 3.9
  Top Layer w0.254: U8.6 82.64,43.625 83,43.265 R22.2 R21.1
NetR23_1: R23.1 R24.1 U8.5 | length 8.2
  Top Layer w0.254: R23.1 81.374,42.128 81.374,43.452 U8.5 81.37,45.52 81.85,46 R24.1
NetR25_1: R25.1 R26.2 U8.2 | length 3.5
  Top Layer w0.254: R25.1@77.26,40.49 R25.1 ; R25.1@77.56,40.59 U8.2
NetR27_1: R27.1 R28.1 U8.3 | length 10.2
  Top Layer w0.254: R27.1 78.83,42.13 U8.3 78.83,45.68 80.7,47.55 80.7,50.216 80.45,50.466 R28.1
NetR29_1: R29.1 R30.2 U8.13 | length 4
  Top Layer w0.254: R29.1 77.1,53.255 R30.2 77.56,51.09 U8.13
NetR31_1: R31.1 R32.1 U8.12 | length 4.3
  Top Layer w0.254: U8.12 78.83,51.62 R31.1 78.925,51.65 R32.1@80.325,53.05
NetR33_2: R33.2 U8.10 | length 9.9
  Top Layer w0.254: U8.10 81.2,49.67 81.2,54.455 81.5,54.755 R33.2
NetU3_2: U3.2 U4.4 | length 4.9
  Top Layer w0.254: U4.4 63.059,22.21 65.395,19.556 U3.2
NetU4_2: U4.2 U5.4 | length 4.9
  Top Layer w0.254: U5.4 54.578,22.21 56.913,19.556 U4.2
NetU5_2: U5.2 U6.4 | length 4.9
  Top Layer w0.254: U6.4 46.096,22.21 48.432,19.556 U5.2
NTC: U1.8
OVGATE: Q2.4 U2.1 | length 3.2
  Top Layer w0.254: U2.1 62.362,42.15 62.56,42.348 Q2.4
OVSENS: R14.1 U2.2 | length 5.2
  Top Layer w0.254: U2.2 61.158,42.65 61.333,42.825 v1(61.4,42.825)
  Int2 (Sign) w0.254: v1(59.7,40.15) 61.4,41.85 v1(61.4,42.825)
SET: R7.2 U1.2 | length 11.2
  Top Layer w0.254: R7.2 v1(29.7,50.9) ; v1(38.5,50.8) U1.2
  Int2 (Sign) w0.254: v1(29.7,50.9) 29.767,50.9 29.867,50.8 v1(38.5,50.8)
Shield: C22.2 C23.2 C24.2 C25.2 MH1.1 MH2.1 MH3.1 MH4.1 R35.1 R36.1 R37.1 R38.1
SNS_BATT_HIGH: C2.1 C3.1 C4.2 D2.3 R4.2 R5.1 R6.2 U1.9 U9.3 | length 6.9
  Top Layer w0.254: U1.9 39.4,55.496 39.604,55.7 D2.3 ; R5.1 53.575,57.685 53.74,57.85 U9.3
  Top Layer w0.7: C4.2 R5.1@53.475,55.26
SNS_BUS_LOW: Q1.2 R10.2 U10.4 | length 8.7
  Top Layer w0.254: U10.4 45.7,37.125 47.9,34.925 R10.2
  Top Layer w0.7: R10.2 Q1.2
SNS_PV_HIGH: C5.2 J2.1 R3.1 R7.1 U7.3 | length 20.4
  Top Layer w0.254: U7.3 26.218,55.823 27.569,54.473 27.569,54.331 30.634,51.265 30.935,51.265 33.9,48.3 38,48.3 38.5,47.8 38.6,47.8
  Top Layer w0.7: J2.1 C5.2
SNS_PV_LOW: R3.2 U1.1 U1.3 U7.4 | length 19.5
  Top Layer w0.254: U7.4 27.923,54.477 30.6,51.8 30.901,51.8 34.001,48.7 37.772,48.7 37.92,48.849 37.92,49.202 38.243,49.525 R3.2 ; U1.1 38.05,51.025 38.023,50.998 38.023,50.602 38.05,50.575 38.05,49.65 R3.2@38.2,49.5 ; R3.2@38.5,49.5 38.801,49.5 38.95,49.649 38.95,50.575 38.977,50.602 38.977,50.998 38.95,51.025 U1.3
V_BATT: J1.1 R5.2 U2.11 U9.4 | length 5.4
  Top Layer w0.254: U9.4 56.15,55.475 R5.2
  Top Layer w0.7: J1.1 R5.2@56.2,55.375
V_BUS: C10.1 C11.1 C12.1 C13.1 F4.1 J6.1 U3.1 U4.1 U5.1 U6.1 U10.3 | length 59.1
  Top Layer w0.254: C13.1 40.524,22.583 U6.1 ; F4.1 41.118,34.951 41.118,35.848 42.869,37.6 42.869,37.965 43.035,38.13 U10.3 ; U5.1 49.066,22.545 C12.1 ; U4.1 57.561,22.558 C11.1 ; U3.1 66.037,22.552 C10.1
  Top Layer w0.7: F4.1 40.739,34.572 40.739,28.563 J6.1 40.652,28.476 38.71,28.476 38.3,28.066 38.3,22.943 38.71,22.533 U6.1 40.873,22.533 43.028,24.688 46.6,24.688 48.755,22.533 U5.1 49.355,22.533 51.322,24.5 55.27,24.5 57.236,22.533 U4.1 59.336,22.533 61.203,24.4 63.851,24.4 65.718,22.533 U3.1
VDD/2: J13.1 R24.2 R28.2 R32.2 U8.8 U8.9 | length 14.3
  Top Layer w0.254: U8.8 U8.9 ; R24.2 83.35,47.5 82.6,48.25 82.6,49.46 U8.9 ; J13.1 83.37,53.05 R32.2 R28.2 81.95,50.615 82.64,49.925 U8.9
VOUT: C7.1 C20.1 J7.1 L2.2 U2.12 U2.18 | length 19
  Top Layer w0.254: v1(55.3,45.7) 55.347,45.653 55.347,45.104 56.178,44.273 56.315,44.273 56.438,44.15 U2.12 ; v1@57.527,40.299 57.569,40.299 57.95,40.68 U2.18
  Int3 (Sign) w0.254: v1(55.3,45.7) 54.9,45.3 54.9,41.9 56.5,40.3 v1(57.501,40.299) v1(57.501,40.299)
  Bottom Layer w0.254: J7.1 52.4,38.4 56.5,38.4 57.1,39 57.1,39.573 57.507,39.98 C20.1
pads on no net: D1.2 D2.2 F1.FID F2.FID F3.FID MD1.7 MD1.8 MD1.12 U2.10 U6.2

## Other copper
Top Layer:
  region net V_BATT: 56.122,44.65 57.1,44.65 57.1,52.7 56.7,53.1 56.5,53.1 56.122,53.1 56.122,44.8
  region net NetD3_1: 66.975,33.979 57.925,33.979 57.925,38.673 66.975,38.687
  region net NetC8_1: 66.8,41.6 66.8,43.4 66.7,43.5 63.5,43.5 63.4,43.4 63.4,41.6
  region net VOUT: 56.9,44 52.5,44 52.4,44.1 52.4,46.1 54.2,46.1 56,44.3 56.9,44.3
  region net NetL2_1: 56.9,43.3 56.178,43.3 55.753,42.875 52.6,42.875 52.6,41.9 55.1,41.9 56.2,43 56.9,43
  region net NetD3_2: 64.1,31.3 64.1,32.8 58.3,32.8 58.3,31.4 58.4,31.3
  region net BCAP: 38.2,54.1 38.2,55.1 36.6,56.7 36.6,66.1 33.6,66.1 33.6,56.41 33.8,56.3 37.8,54.1
  region net SNS_PV_HIGH: 28.4,45.9 39.5,45.9 39.5,47.5 39,48 28.4,48
  region net SNS_BATT_HIGH: 39.5,54.1 39.5,55.042 39.658,55.2 41.8,55.2 42.3,54.7 42.3,54.4 52.2,54.4 52.2,56.6 39.3,56.6 39.3,54.098
  region net NetL1_2: 38.83,54 38.83,58.254 39.3,58.889 39.3,70.1 43.5,70.1 43.5,58.889 40.402,58.889 39.081,58.164 39.081,57.481 39.081,54
Bottom Layer:
  region net NetC8_1: 65.3,43.4 62.7,43.4 61.775,42.475 57.075,42.475 57.075,44.4 55.4,44.4 55.4,41.6 55.7,41.3 65.3,41.3

## Silkscreen, mask and mechanical layers (free items; w line width, h text height)
Top Overlay:
  drawing of 22 lines, arcs and shapes, not listed
  text "Chioreanu Andreea" at 62.373,143.894 h1.5
  text "Licenta 2023 -ETTI" at 62.273,142.391 h1.5
  text "Convertor de putere bidirectional preconizat pentru aplicatii spatiale active de iluminat" at 53.223,128.773 h1.5
Mechanical 1:
  the board outline again, w0.254